# Altium PCB STM32F429VET6_SRK1201L.PcbDoc (part 1 of 2)
Units mil, origin at the board's own origin, x right, y up, seen from the top; angles counter-clockwise.
Board outline 1653 x 1966 mil, 4 copper layers (Top Layer, Layer 1, Layer 2, Bottom Layer), stack 23.756 mil thick; 125 components, 111 nets, 424 pads, 295 vias.
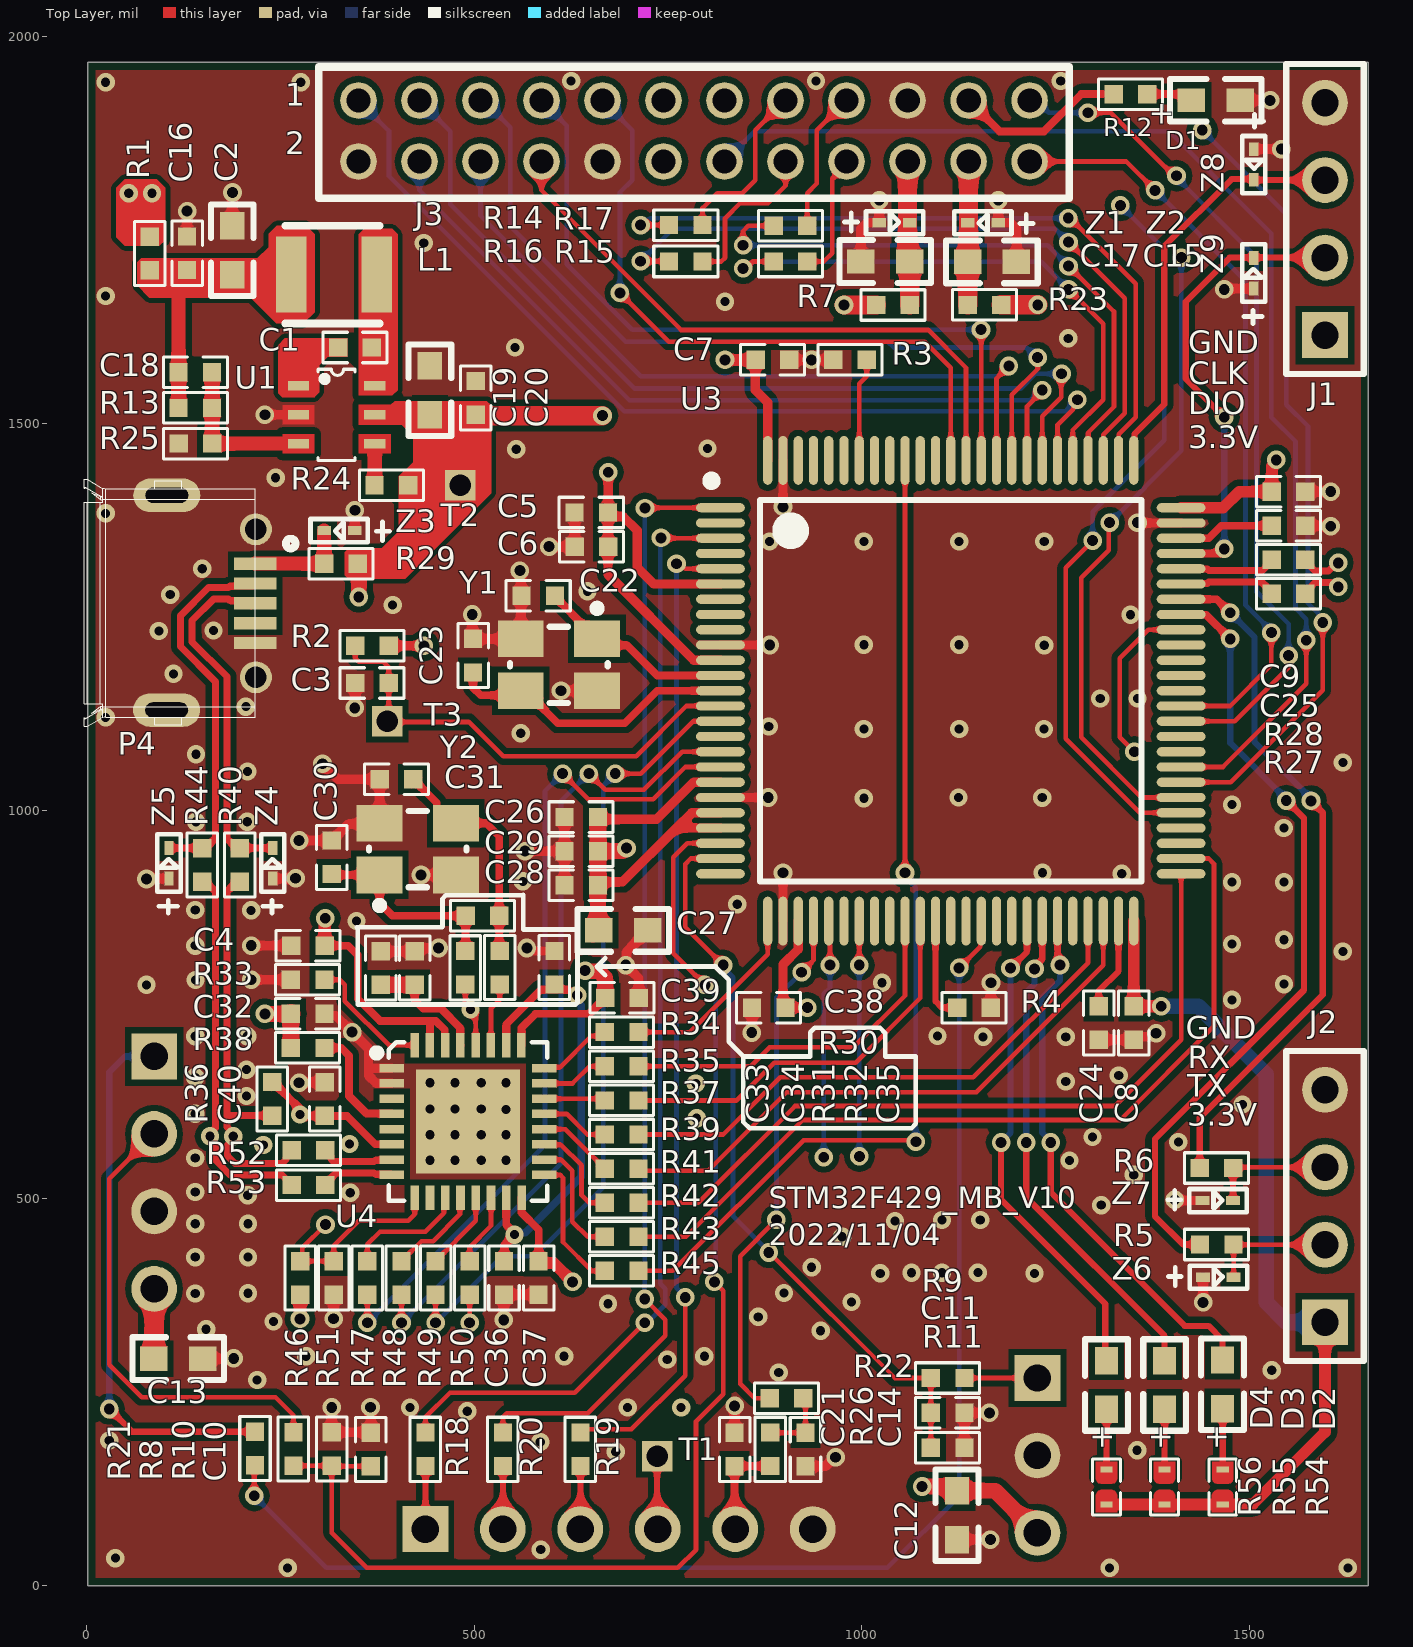
[diagram p0: Top Layer view]
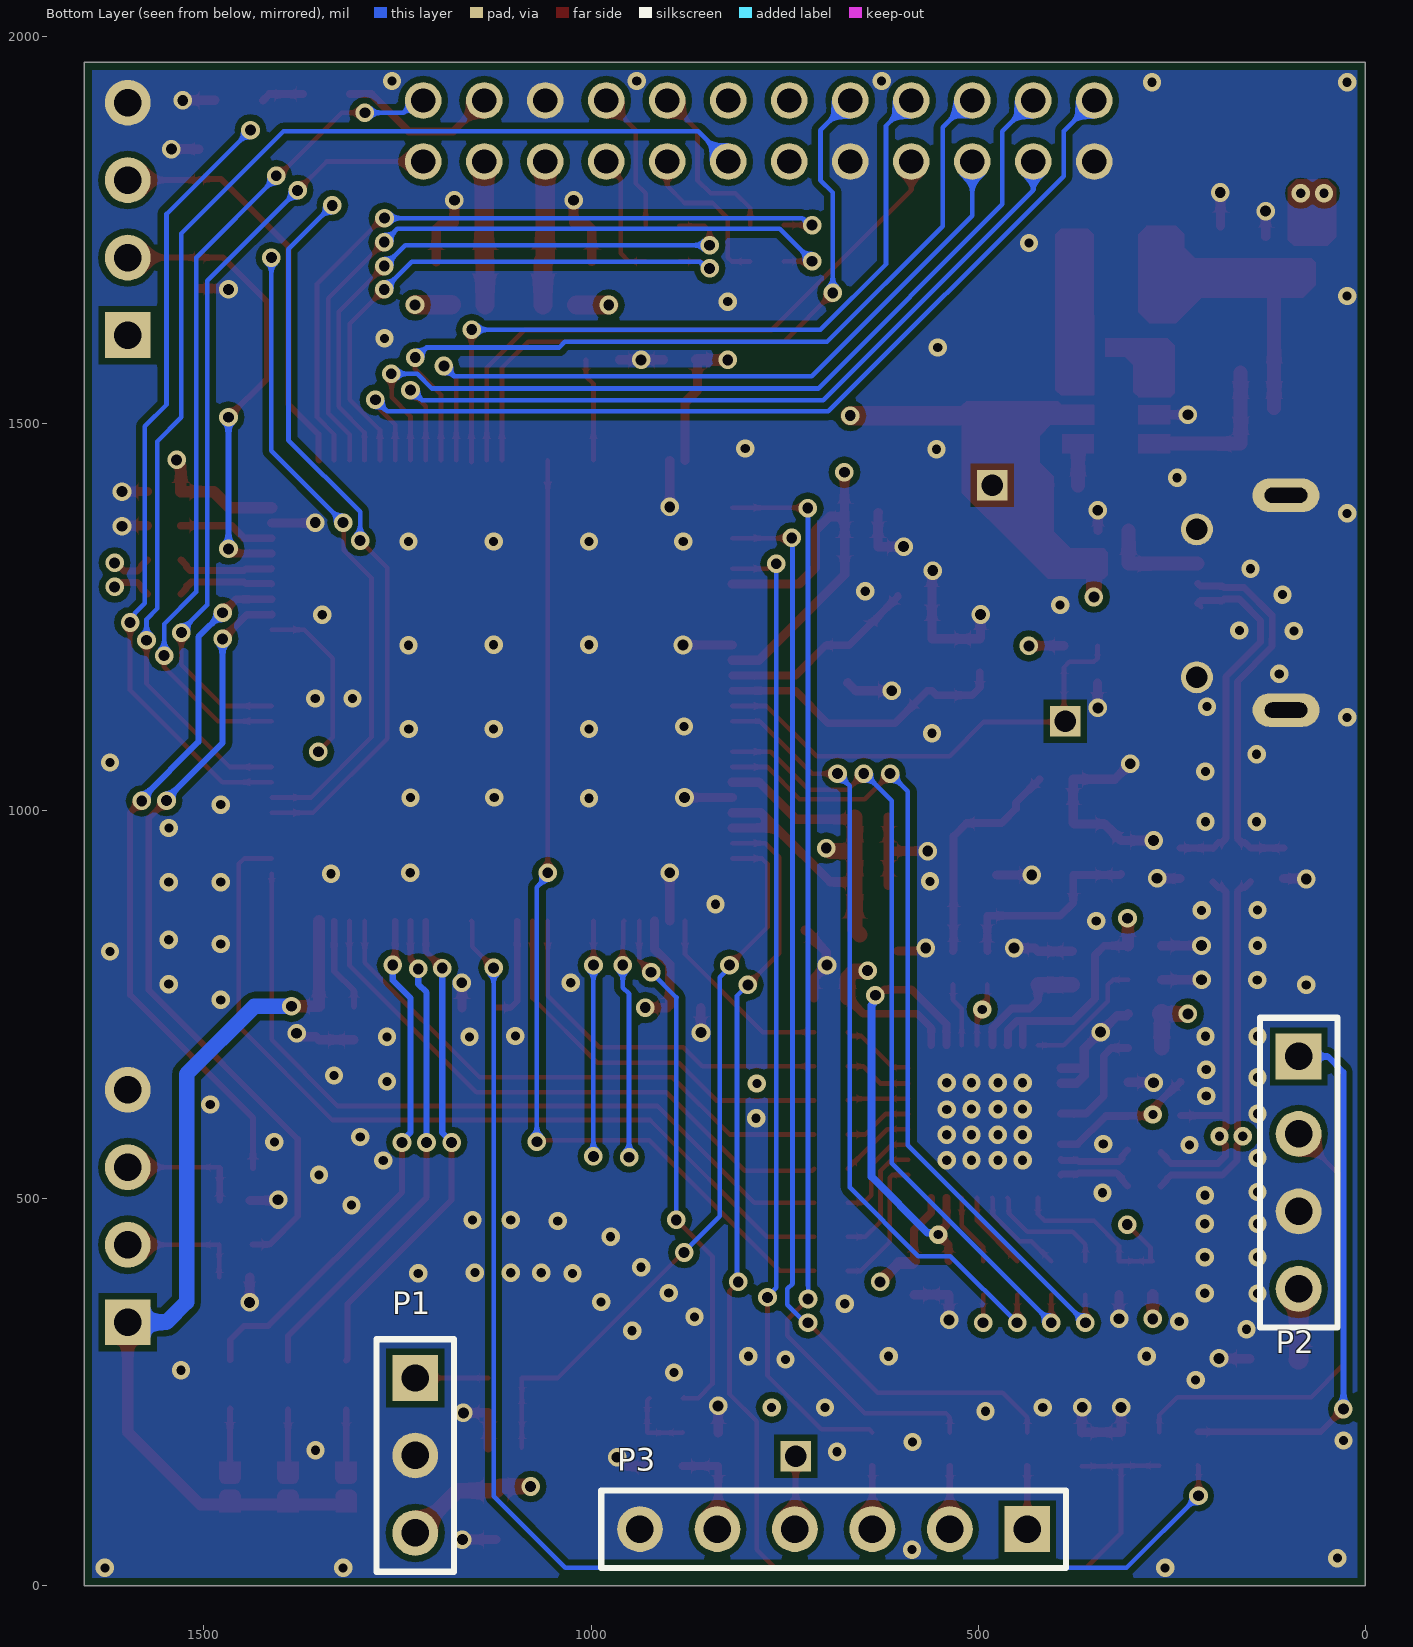
[diagram p1: Bottom Layer view, seen from below]
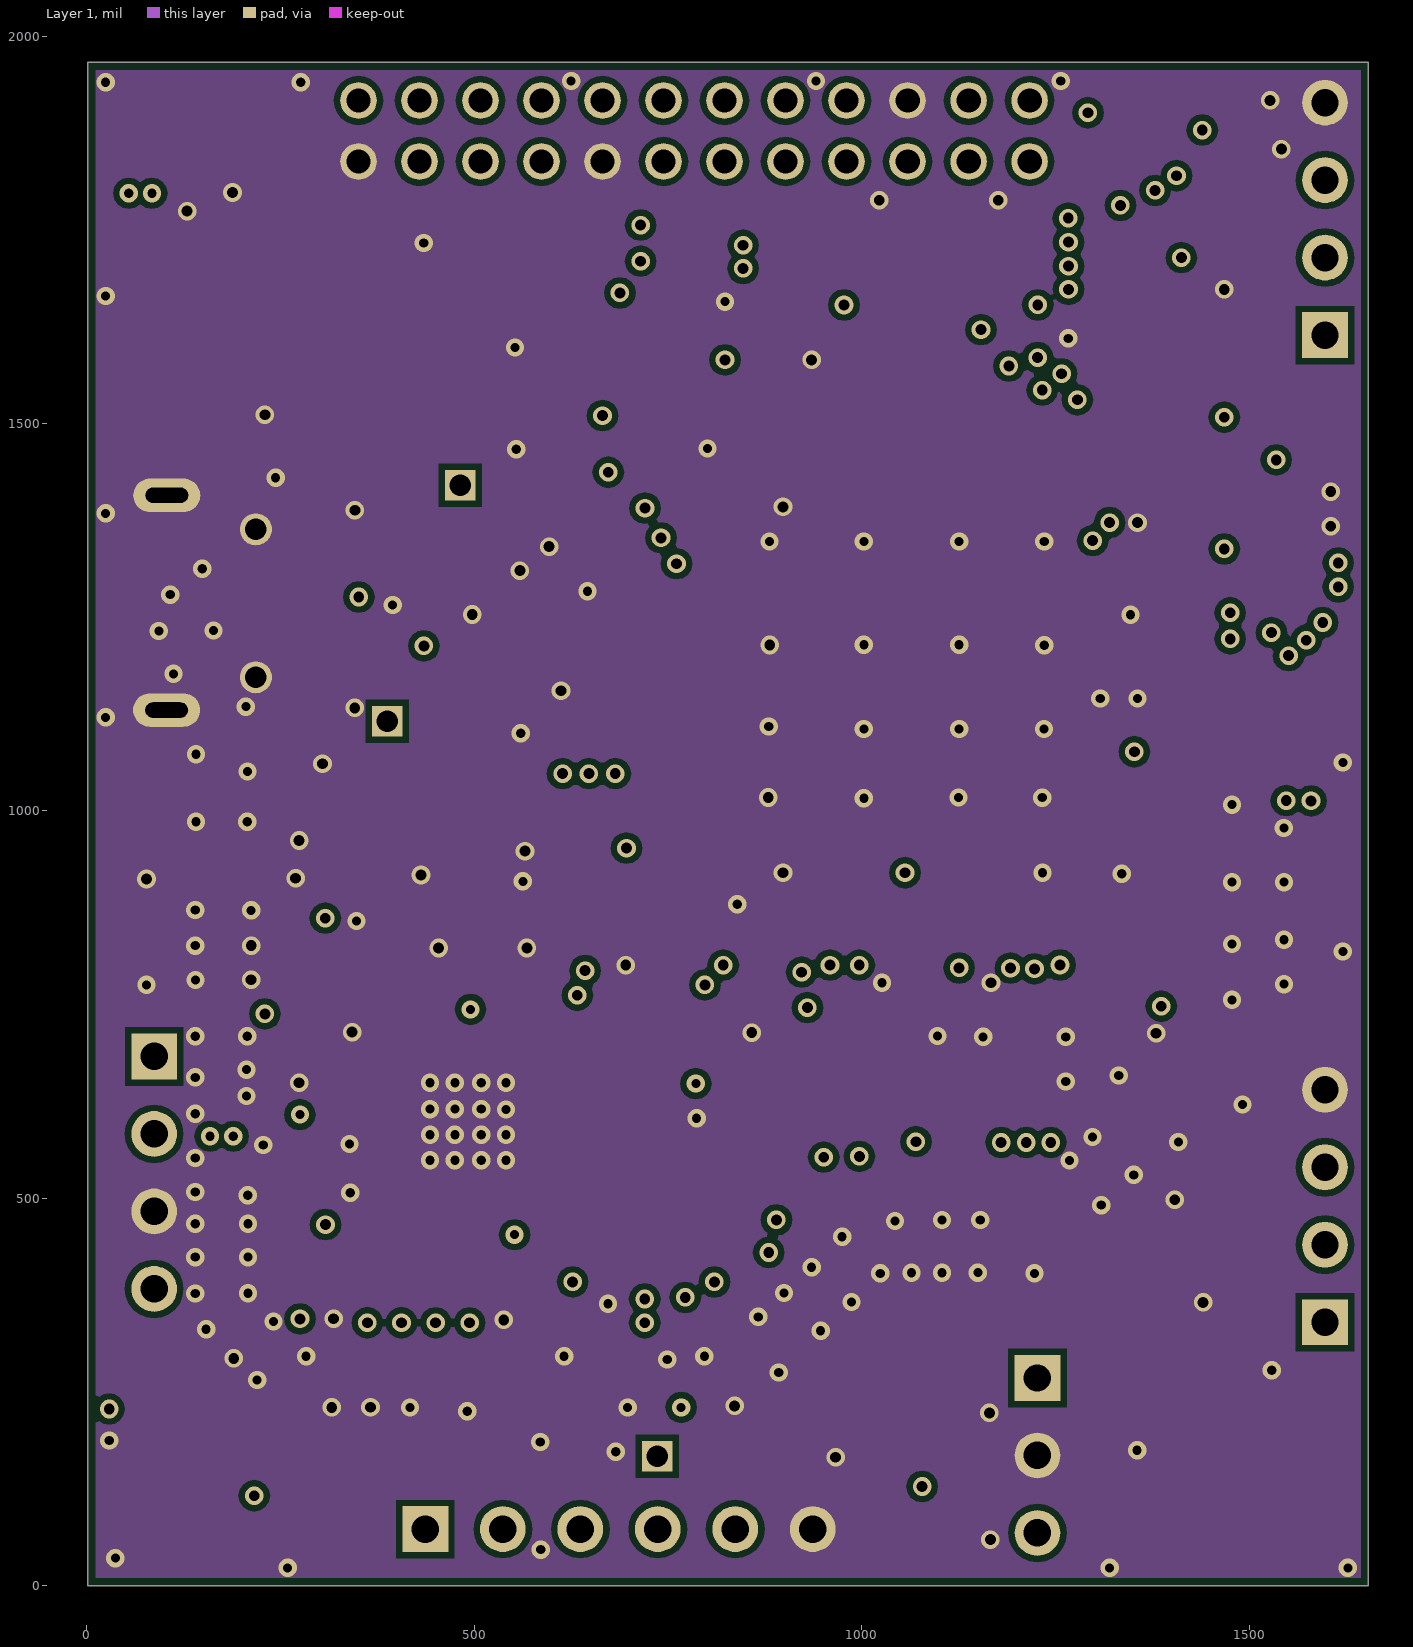
[diagram p2: Layer 1]
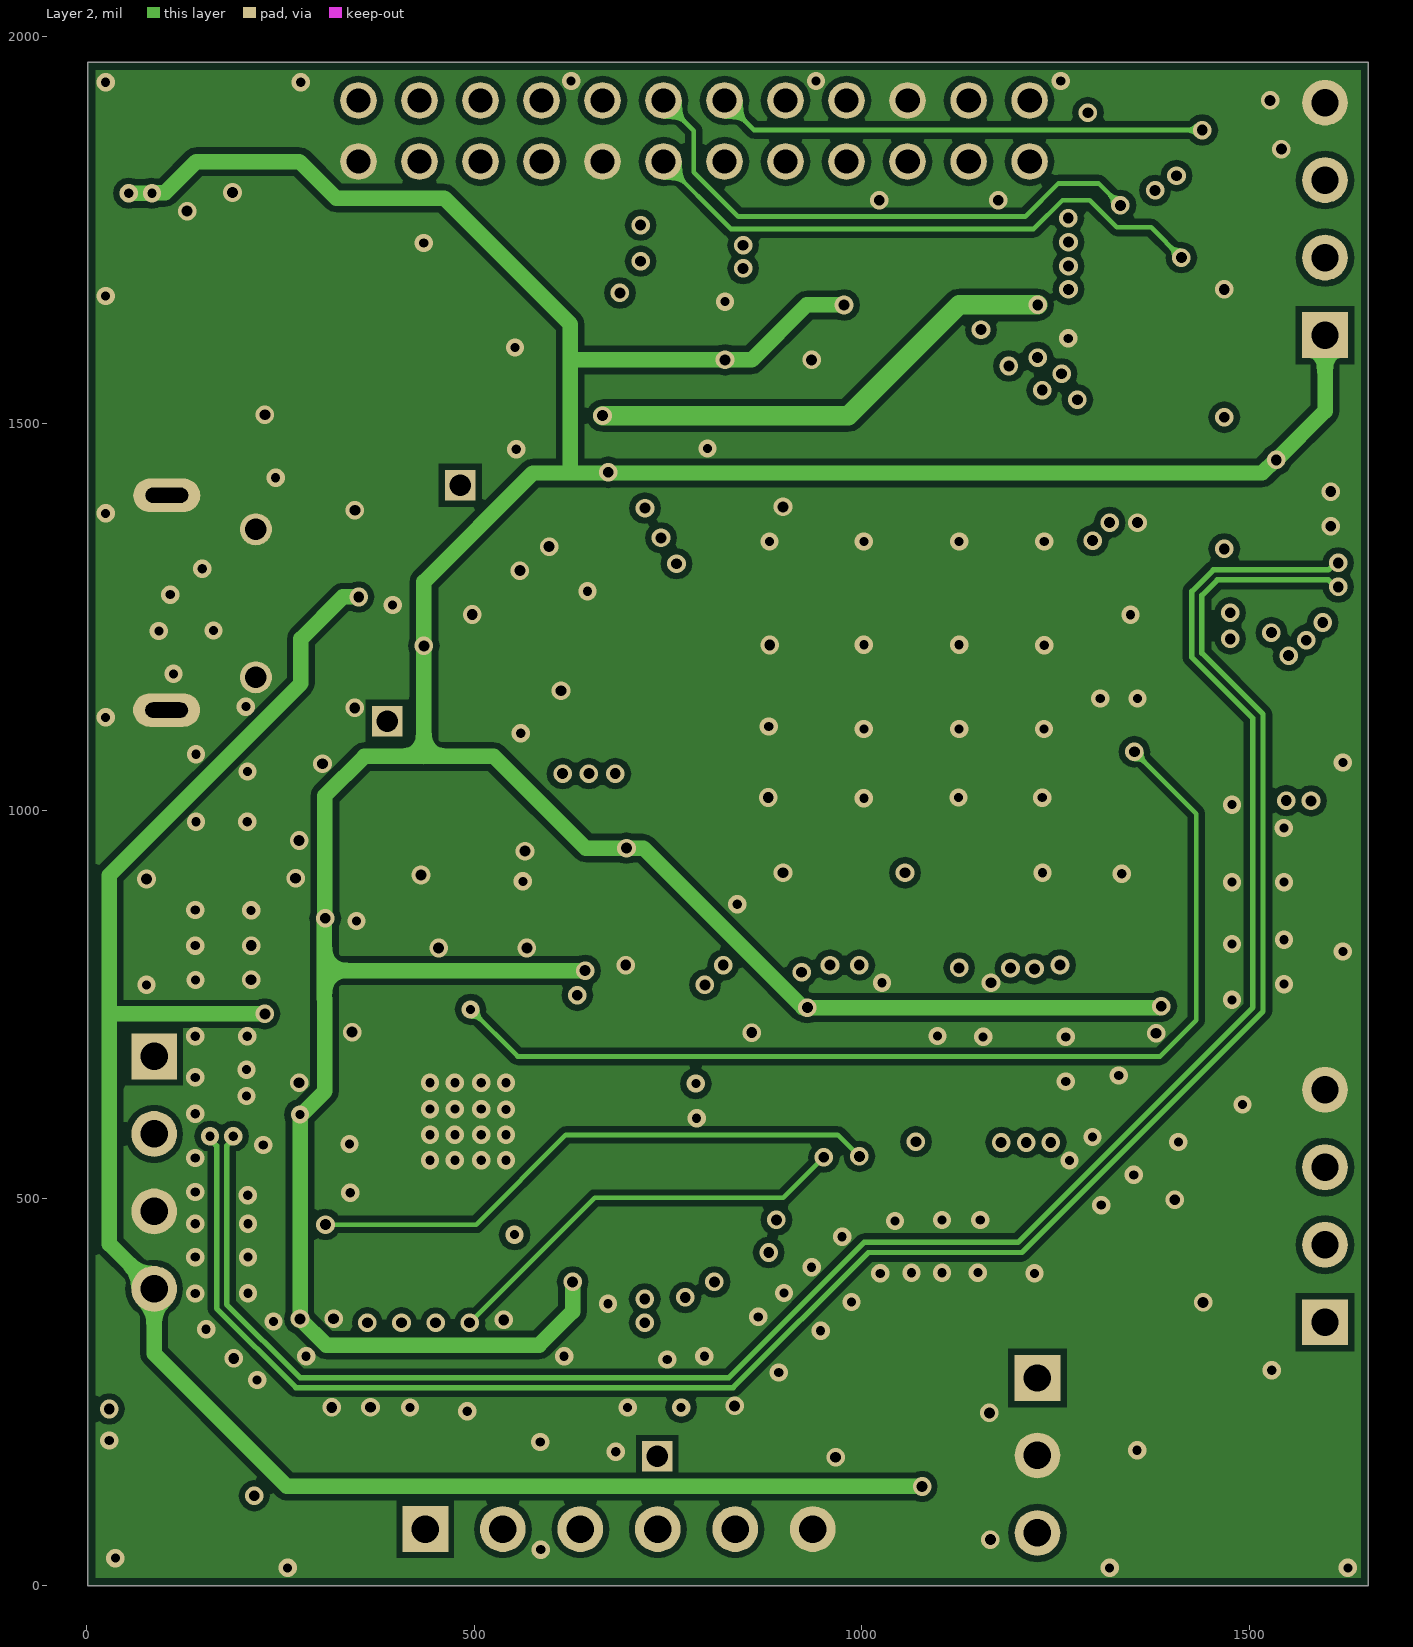
[diagram p3: Layer 2]
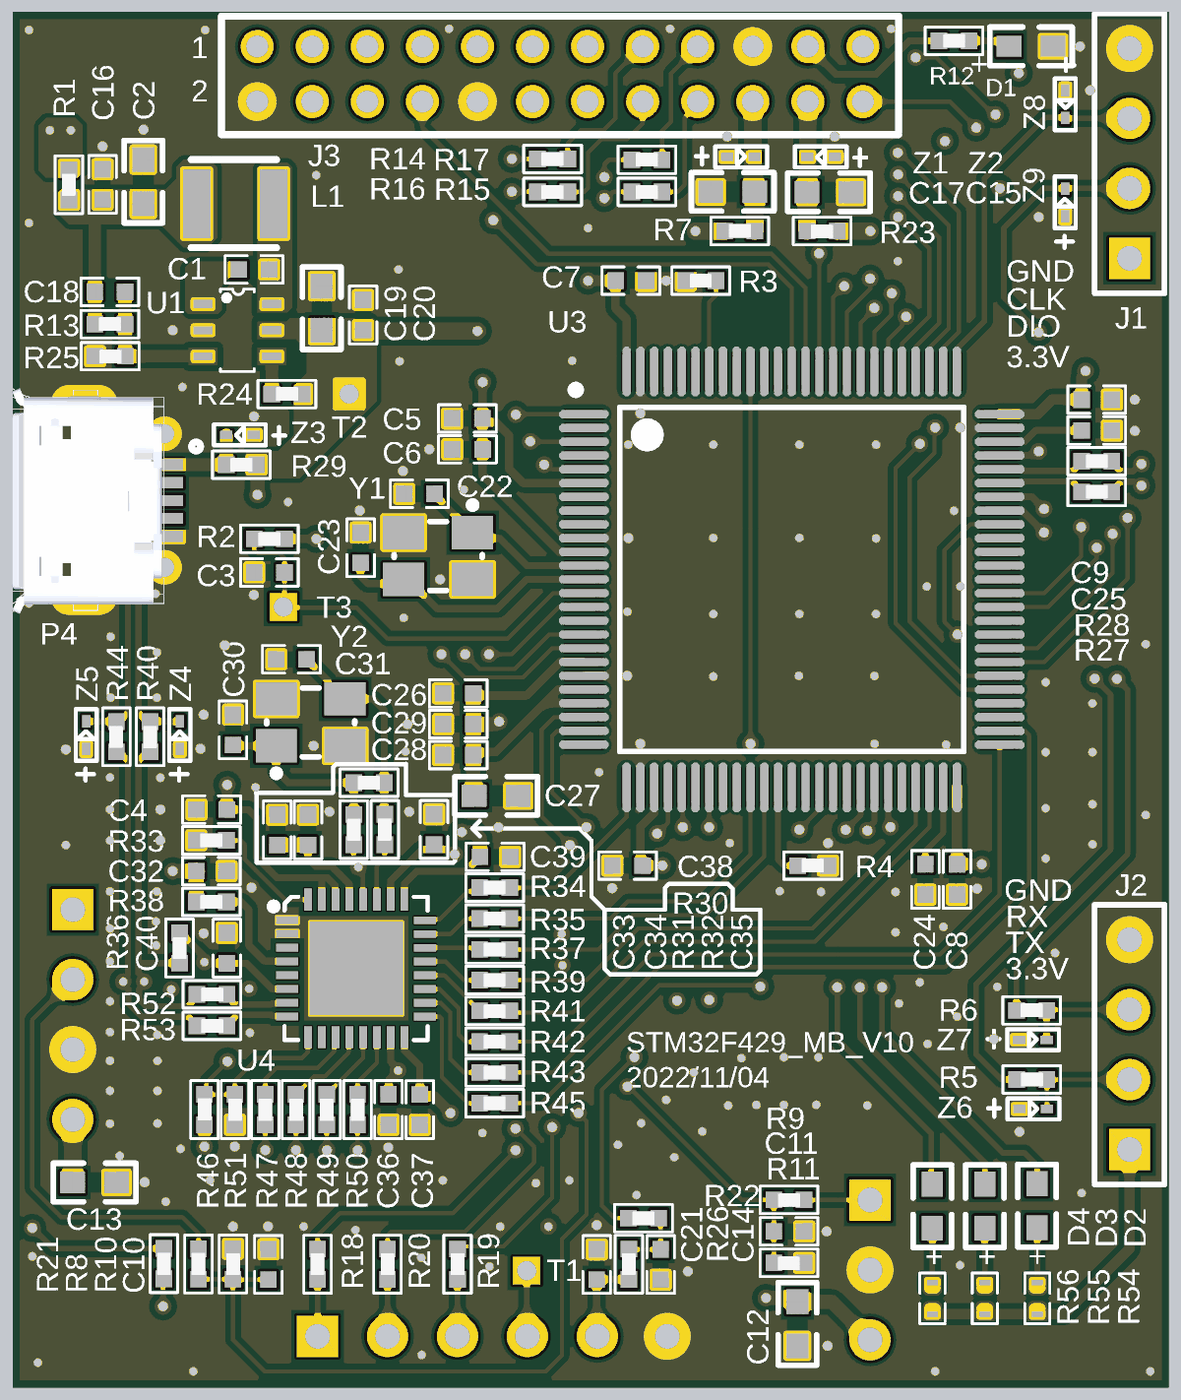
[diagram p4: 3D render of the assembled board from above, using the file's embedded part models]

## Layer stack, top to bottom
Top Solder: solder mask 0.4, Solder Resist, Dk 3.5
Top Layer: signal copper 1.4
Dielectric 2: prepreg 2.8, PP-006, Dk 4.1
Layer 1: signal copper 1.3779
Dielectric 1: dielectric 12.6, FR-4, Dk 4.8
Layer 2: signal copper 1.3779
Dielectric 3: prepreg 2.8, PP-006, Dk 4.1
Bottom Layer: signal copper 1.4
Bottom Solder: solder mask 0.4, Solder Resist, Dk 3.5

## Board outline
1,0 1,1966 1654,1966 1654,0

## Design rules (kind name [scope] priority, off if disabled: settings)
BoardOutlineClearance [All] p1: gap=10 ignorepadtopadclearanceinfootprint=FALSE except(0: Arc-SplitContinuation Track-OutlineEdge Track-CavityEdge Track-CutoutEdge Track-SplitBarrior Track-SplitContinuation SMDPad-SplitContinuation THPad-SplitContinuation Via-SplitContinuation Fill-SplitContinuation Poly-SplitContinuation Region-SplitContinuation Text-OutlineEdge Text-CavityEdge Text-CutoutEdge Text-SplitBarrior Text-SplitContinuation)
Clearance [All] p1: gap=6 ignorepadtopadclearanceinfootprint=FALSE except(0: Arc-Hole Track-Hole SMDPad-Hole THPad-Hole Via-Hole Fill-Hole Poly-Hole Region-Hole Text-Hole; 8: Arc-Poly Track-Poly SMDPad-Poly THPad-Poly Via-Poly Fill-Poly Poly-Poly)
DiffPairsRouting DiffPair_DiffPairsRouting [InDifferentialPair ('NewDifferentialPair4')] p1: maxlimit=6 minlimit=6 mostfreqgap=6 toplayer_minwidth=9 toplayer_maxwidth=9 toplayer_prefwidth=9 midlayer1_minwidth=9 midlayer1_maxwidth=9 midlayer1_prefwidth=9 midlayer2_minwidth=7 midlayer2_maxwidth=7 midlayer2_prefwidth=7 bottomlayer_minwidth=9 bottomlayer_maxwidth=9 bottomlayer_prefwidth=9 maxuncoupledlength=500
DiffPairsRouting DiffPair_DiffPairsRouting_1 [InDifferentialPair ('NewDifferentialPair3')] p2: maxlimit=6 minlimit=6 mostfreqgap=6 toplayer_minwidth=9 toplayer_maxwidth=9 toplayer_prefwidth=9 midlayer1_minwidth=9 midlayer1_maxwidth=9 midlayer1_prefwidth=9 midlayer2_minwidth=7 midlayer2_maxwidth=7 midlayer2_prefwidth=7 bottomlayer_minwidth=9 bottomlayer_maxwidth=9 bottomlayer_prefwidth=9 maxuncoupledlength=500
DiffPairsRouting DiffPair_DiffPairsRouting_2 [InDifferentialPair ('NewDifferentialPair2')] p3: maxlimit=6 minlimit=6 mostfreqgap=6 toplayer_minwidth=9 toplayer_maxwidth=9 toplayer_prefwidth=9 midlayer1_minwidth=9 midlayer1_maxwidth=9 midlayer1_prefwidth=9 midlayer2_minwidth=7 midlayer2_maxwidth=7 midlayer2_prefwidth=7 bottomlayer_minwidth=9 bottomlayer_maxwidth=9 bottomlayer_prefwidth=9 maxuncoupledlength=500
DiffPairsRouting DiffPair_DiffPairsRouting_3 [InDifferentialPair ('NewDifferentialPair1')] p4: maxlimit=6 minlimit=6 mostfreqgap=6 toplayer_minwidth=9 toplayer_maxwidth=9 toplayer_prefwidth=9 midlayer1_minwidth=9 midlayer1_maxwidth=9 midlayer1_prefwidth=9 midlayer2_minwidth=7 midlayer2_maxwidth=7 midlayer2_prefwidth=7 bottomlayer_minwidth=9 bottomlayer_maxwidth=9 bottomlayer_prefwidth=9 maxuncoupledlength=500
DiffPairsRouting [All] p5: maxlimit=10 minlimit=10 mostfreqgap=10 toplayer_minwidth=15 toplayer_maxwidth=15 toplayer_prefwidth=15 midlayer1_minwidth=15 midlayer1_maxwidth=15 midlayer1_prefwidth=15 midlayer2_minwidth=15 midlayer2_maxwidth=15 midlayer2_prefwidth=15 bottomlayer_minwidth=15 bottomlayer_maxwidth=15 bottomlayer_prefwidth=15 maxuncoupledlength=500
HoleToHoleClearance [All] p1: gap=0 allowstackedmicrovias=TRUE
MatchedLengths DiffPair_MatchedLengths [InDifferentialPair ('NewDifferentialPair4')] p1: tolerance=1000 checknetsindiffpair=FALSE checkdiffpairvsdiffpair=TRUE checkxsignals=TRUE checkothers=TRUE
MatchedLengths DiffPair_MatchedLengths_1 [InDifferentialPair ('NewDifferentialPair3')] p2: tolerance=1000 checknetsindiffpair=FALSE checkdiffpairvsdiffpair=TRUE checkxsignals=TRUE checkothers=TRUE
MatchedLengths DiffPair_MatchedLengths_2 [InDifferentialPair ('NewDifferentialPair2')] p3: tolerance=1000 checknetsindiffpair=FALSE checkdiffpairvsdiffpair=TRUE checkxsignals=TRUE checkothers=TRUE
MatchedLengths DiffPair_MatchedLengths_3 [InDifferentialPair ('NewDifferentialPair1')] p4: tolerance=1000 checknetsindiffpair=FALSE checkdiffpairvsdiffpair=TRUE checkxsignals=TRUE checkothers=TRUE
MinimumSolderMaskSliver [All] p1: minsoldermaskwidth=0
PlaneConnect [All] p1: planeconnectstyle=Direct reliefexpansion=20 reliefentries=4 reliefconductorwidth=10 reliefairgap=10
PolygonConnect [All] p1: connectstyle=Direct reliefconductorwidth=10 reliefentries=4 polygonreliefangle="90 Angle" airgapwidth=10
RoutingVias [All] p1: holewidth=28 width=50 viastyle="Through Hole" minholewidth=12 minwidth=22 maxholewidth=28 maxwidth=50
SilkToSilkClearance [All] p1: silktosilkclearance=0
SilkToSolderMaskClearance [IsPad] p1: minsilkscreentomaskgap=0 clearancetoexposedcopper=TRUE
SolderMaskExpansion [All] p1: expansion=4
Width [All] p1: maxlimit=50 minlimit=6 preferedwidth=10 minimp=50.000000 maximp=50.000000 favimp=50.000000
24 further rules are at their usual default settings.

## Classes and differential pairs
component class USB3300-EZK-PHY: C30 C31 C32 C33 C34 C35 C36 C37 C38 C39 C40 P4 R29 R30 R31 R32 R33 R34 R35 R36 R37 R38 R39 R40 R41 R42 R43 R44 R45 R46 R47 R48 R49 R50 R51 R52 R53 U4 Y2 Z3 Z4 Z5
component class SRK1201L_MODUL_CON: C1 C2 C10 C11 C12 C13 C14 C15 C16 C17 C18 C19 C20 C21 D1 J3 L1 P1 P2 P3 R1 R8 R9 R10 R11 R12 R13 R14 R15 R16 R17 R18 R19 R20 R21 R22 R23 R24 R25 R26 T1 T2 U1 Z1 Z2
component class STM32F429VET6: C3 C4 C5 C6 C7 C8 C9 C22 C23 C24 C25 C26 C27 C28 C29 D2 D3 D4 J1 J2 R2 R3 R4 R5 R6 R7 R27 R28 R54 R55 R56 T3 U3 Y1 Z6 Z7 Z8 Z9
differential pair NewDifferentialPair4: +UD+ -UD-
differential pair NewDifferentialPair3: +NetR52_2 -NetR53_2
differential pair NewDifferentialPair2: +NetR28_1 -NetR27_1
differential pair NewDifferentialPair1: +MICRO_USB_DP -MICRO_USB_DM

## Components (designator, comment, footprint, x,y, rotation, side; value= is the part's Value field where it differs from the comment)
C1 "100nF" C0402 346,1598 r180 top
C2 "10uF" C0603 187.73,1723.55 r90 top
C3 "100nF" C0402 368,1165 r180 top
C4 "100nF" C0402 285.35,826 r180 top
C5 "100nF" C0402 651,1385 r180 top
C6 "100nF" C0402 651.26,1341 r180 top
C7 "100nF" C0402 885,1582 r0 top
C8 "100nF" C0402 1351.22,726.19 r270 top
C9 "100nF" C0402 1551,1412 r0 top
C10 "100nF" C0402 366.61,175.82 r90 top
C11 "100nF" C0402 1111,223 r0 top
C12 "10uF" C0603 1123,91 r270 top
C13 "10uF" C0603 118,293 r0 top
C14 "1nF" C0402 927.51,175.65 r270 top
C15 "10uF" C0603 1168.14,1708.47 r0 top
C16 "100nF" C0402 129.38,1719.61 r270 top
C17 "10uF" C0603 1030.5,1709 r180 top
C18 "22pF" C0402 140,1566 r180 top
C19 "10uF/16V" C0603 442.81,1542.65 r90 top
C20 "100nF" C0402 501.95,1532.97 r270 top
C21 "1nF" C0402 836,175.65 r90 top
C22 "22pF" C0402 582.58,1277.44 r180 top
C23 "22pF" C0402 498.42,1200.29 r90 top
C24 "2.2uF" C0402 1305.94,726.19 r270 top
C25 "2.2uF" C0402 1551,1368 r0 top
C26 "1uF" C0402 638,992 r180 top
C27 "10uF" C0603 692.34,845.68 r0 top
C28 "2.2uF" C0402 638,904 r180 top
C29 "100nF" C0402 638,948 r180 top
C30 "9pF" C0402 316,940 r90 top
C31 "9pF" C0402 399.51,1040.79 r180 top
C32 "2.2uF" C0402 285,738 r0 top
C33 "4.7uF" C0402 379.19,797 r90 top
C34 "100nF" C0402 423.19,797 r90 top
C35 "4.7uF" C0402 603.48,797.56 r90 top
C36 "100nF" C0402 538.38,397.21 r270 top
C37 "100nF" C0402 583,397 r270 top
C38 "100nF" C0402 880,746 r180 top
C39 "100nF" C0402 690.71,758.49 r0 top
C40 "100nF" C0402 307,628 r90 top
D1 "LED1" LED-0603 1457,1917 r0 top
D2 "LED1" LED-0603 1465.63,259.74 r90 top
D3 "LED1" LED-0603 1391,259 r90 top
D4 "LED1" LED-0603 1316,259 r90 top
J1 "DOWNLOAD" J4 1598,1614 r270 top
J2 "ISP" J4 1598,340 r270 top
J3 "DC3_24P" "CON2.0-12X2 -SWAP" 1216.7,1916.74 r180 top
L1 "PRS3015-100MT" PRS3015 374.18,1692.05 r180 top
P1 "Header 3" HDR1X3-2.54 1226.85,268.01 r270 bottom locked
P2 "Header4" J4 86.85,683.01 r90 bottom locked
P3 "Header 6" HDR1X6 436.92,73 r0 bottom locked
P4 "USB" "USB 牛角头" 217.17,1318.98 r90 top
R1 "0" R0402#1 81.35,1719.22 r270 top
R2 "10K" R0402#1 368,1213 r180 top
R3 "10K" R0402#1 985,1582 r180 top
R4 "10K" R0402#1 1145,746 r180 top
R5 "100R" R0402#1 1458.2,440.32 r0 top
R6 "100R" R0402#1 1458,539 r0 top
R7 "0" R0402#1 1040.43,1652.84 r0 top
R8 "0" R0402#1 266.61,176.43 r90 top
R9 "0" R0402#1 1111,268 r0 top
R10 "47K" R0402#1 315.91,176.43 r270 top
R11 "47K" R0402#1 1111,178 r180 top
R12 "300R" R0402#1 1347,1925 r0 top
R13 "100K" R0402#1 140,1520 r180 top
R14 "0" R0402#1 773,1756 r180 top
R15 "0" R0402#1 908,1709 r180 top
R16 "0" R0402#1 773,1709 r180 top
R17 "0" R0402#1 908,1755 r180 top
R18 "0" R0402#1 437,176 r90 top
R19 "0" R0402#1 637,176 r90 top
R20 "0" R0402#1 537,176 r90 top
R21 "0" R0402#1 217,177 r270 top
R22 "1K" R0402#1 903,242 r180 top
R23 "0" R0402#1 1158.52,1652.93 r180 top
R24 "47k" R0402#1 393,1420 r0 top
R25 "22K" R0402#1 140.35,1474 r0 top
R26 "1K" R0402#1 882,176 r90 top
R27 "NC" R0402#1 1551,1280 r0 top
R28 "NC" R0402#1 1551,1324 r0 top
R29 "0 OHM" R0402#1 327.94,1318.98 r180 top
R30 "1M" R0402#1 510.5,864.44 r180 top
R31 "0" R0402#1 488.5,797.44 r270 top
R32 "0" R0402#1 532.97,797.56 r270 top
R33 "12K_1%" R0402#1 285,782 r180 top
R34 "0" R0402#1 690.21,714.43 r180 top
R35 "0" R0402#1 690.21,670.24 r180 top
R36 "1.5K" R0402#1 239.48,628.28 r270 top
R37 "0" R0402#1 690.21,626.24 r180 top
R38 "100" R0402#1 285,694 r180 top
R39 "0" R0402#1 690.21,582.24 r180 top
R40 "10" R0402#1 197.49,929.94 r270 top
R41 "0" R0402#1 690.21,538.24 r180 top
R42 "0" R0402#1 690.21,494.24 r180 top
R43 "0" R0402#1 690.21,450.24 r180 top
R44 "10" R0402#1 149.06,930.16 r270 top
R45 "0" R0402#1 690.21,406.24 r180 top
R46 "NC" R0402#1 275.26,397.21 r90 top
R47 "0" R0402#1 362.07,397.21 r270 top
R48 "0" R0402#1 406.07,397.21 r270 top
R49 "0" R0402#1 450.07,397.21 r270 top
R50 "33" R0402#1 494.07,397.21 r270 top
R51 "0" R0402#1 318.73,397.21 r270 top
R52 "0" R0402#1 286,562 r0 top
R53 "0" R0402#1 286,517 r0 top
R54 "2K" R0402#2 1466,104.72 r90 top
R55 "2K" R0402#2 1391,104.72 r90 top
R56 "2K" R0402#2 1316,104.72 r90 top
T1 "" TestPoints 736,167 r0 top
T2 "" TestPoints-0.7 482.08,1420 r0 top
T3 "" TestPoints-0.7 387.9,1115.62 r90 top
U1 "SY8120B1ABC" SOT-23-6 273.13,1548.56 r0 top
U3 "STM32F429VET6" LQFP-100_L14.0-W14.0-P0.50-LS16.0-BL 1115,1155 r270 top
U4 "USB3300-EZK" QFN-32_L5.0-W5.0-P0.50-BL-EP3.4 492.03,599.01 r270 top
Y1 "8M" CRYSTAL_3.2*2.5 658.5,1221.94 r180 top
Y2 "24M" CRYSTAL_3.2*2.5 377.86,917.23 r0 top
Z1 "ESD9L5.0ST5G" SOD-923 1022.63,1759 r0 top
Z2 "ESD9L5.0ST5G" SOD-923 1176.37,1759 r180 top
Z3 "ESD9L5.0ST5G" SOD-923 345.66,1361.7 r180 top
Z4 "ESD9L5.0ST5G" SOD-923 240,912.63 r90 top
Z5 "ESD9L5.0ST5G" SOD-923 106,912.63 r90 top
Z6 "ESD9L5.0ST5G" SOD-923 1440.63,398 r0 top
Z7 "ESD9L5.0ST5G" SOD-923 1440,497 r0 top
Z8 "ESD9L5.0ST5G" SOD-923 1506,1854 r270 top
Z9 "ESD9L5.0ST5G" SOD-923 1506,1674 r90 top

## Footprints (in the part's own frame and the unit in brackets; to place one, negate y for a bottom-side part, rotate by r counter-clockwise, add the part's x,y. Pads: shape width x height; smd on the part's side, far side on the other; paste and mask are expansions set on the pad)
C0402 [mm]
  rect 0.6x0.6 smd: 1(-0.55,0) 2(0.55,0)
  silkscreen extent -1.05,-0.5 1.05,0.5, body extent -0.5,-0.3 0.5,0.3, height 0.2
C0603 [mm]
  rect 0.9x0.8 smd: 1(-0.8,0) 2(0.8,0)
  silkscreen extent -1.5,-0.7 1.5,0.7, body extent -0.8,-0.4 0.8,0.4, height 0.6
"CON2.0-12X2 -SWAP" [mm]
  round 1.2 hole 0.8: 1(22,0) 2(22,2) 3(20,0) 4(20,2) 5(18,0) 6(18,2) 7(16,0) 8(16,2) 9(14,0) 10(14,2) 11(12,0) 12(12,2) 13(10,0) 14(10,2) 15(8,0) 16(8,2) 17(6,0) 18(6,2) 19(4,0) 20(4,2) 21(2,0) 22(2,2) 23(0,0) 24(0,2)
  silkscreen extent -1.3,-1.1 23.3,3.2
CRYSTAL_3.2*2.5 [mm]
  rect 1.5x1.2 smd: 1(0,0) 2(2.5,0) 3(2.5,1.7) 4(0,1.7)
  silkscreen extent -0.35,-1.12 2.85,2.1
HDR1X3-2.54 [mm] "Connector; Header; 3 Position"
  rect 1.5x1.5 hole 0.9: 1(0,0)
  round 1.5 hole 0.9: 2(2.54,0) 3(5.08,0)
  silkscreen extent -1.27,-1.27 6.35,1.27, body extent -1.29,-1.29 6.33,1.25, height 10.1
HDR1X6 [mm] "Connector; Header; 6 Position"
  rect 1.5x1.5 hole 0.9: 1(0,0)
  round 1.5 hole 0.9: 2(2.54,0) 3(5.08,0) 4(7.62,0) 5(10.16,0) 6(12.7,0)
  silkscreen extent -1.27,-1.27 13.97,1.27
J4 [mm]
  rect 1.5x1.5 hole 0.9: 1(0,0)
  round 1.5 hole 0.9: 2(-2.54,0) 3(-5.08,0) 4(-7.62,0)
  silkscreen extent -8.89,-1.27 1.27,1.27
LED-0603 [mm]
  rect 0.9x0.762 smd: 1(-0.8,0) 2(0.8,0)
  silkscreen extent -1.5,-0.7 1.5,0.7
LQFP-100_L14.0-W14.0-P0.50-LS16.0-BL [mm]
  oval 0.3x1.6 smd mask+0.051: 1(-6,-7.55) 2(-5.5,-7.55) 3(-5,-7.55) 4(-4.5,-7.55) 5(-4,-7.55) 6(-3.5,-7.55) 7(-3,-7.55) 8(-2.5,-7.55) 9(-2,-7.55) 10(-1.5,-7.55) 11(-1,-7.55) 12(-0.5,-7.55) 13(0,-7.55) 14(0.5,-7.55) 15(1,-7.55) 16(1.5,-7.55) 17(2,-7.55) 18(2.5,-7.55) 19(3,-7.55) 20(3.5,-7.55) 21(4,-7.55) 22(4.5,-7.55) 23(5,-7.55) 24(5.5,-7.55) 25(6,-7.55) 51(6,7.55) 52(5.5,7.55) 53(5,7.55) 54(4.5,7.55) 55(4,7.55) 56(3.5,7.55) 57(3,7.55) 58(2.5,7.55) 59(2,7.55) 60(1.5,7.55) 61(1,7.55) 62(0.5,7.55) 63(0,7.55) 64(-0.5,7.55) 65(-1,7.55) 66(-1.5,7.55) 67(-2,7.55) 68(-2.5,7.55) 69(-3,7.55) 70(-3.5,7.55) 71(-4,7.55) 72(-4.5,7.55) 73(-5,7.55) 74(-5.5,7.55) 75(-6,7.55)
  oval 1.6x0.3 smd mask+0.051: 26(7.55,-6) 27(7.55,-5.5) 28(7.55,-5) 29(7.55,-4.5) 30(7.55,-4) 31(7.55,-3.5) 32(7.55,-3) 33(7.55,-2.5) 34(7.55,-2) 35(7.55,-1.5) 36(7.55,-1) 37(7.55,-0.5) 38(7.55,0) 39(7.55,0.5) 40(7.55,1) 41(7.55,1.5) 42(7.55,2) 43(7.55,2.5) 44(7.55,3) 45(7.55,3.5) 46(7.55,4) 47(7.55,4.5) 48(7.55,5) 49(7.55,5.5) 50(7.55,6) 76(-7.55,6) 77(-7.55,5.5) 78(-7.55,5) 79(-7.55,4.5) 80(-7.55,4) 81(-7.55,3.5) 82(-7.55,3) 83(-7.55,2.5) 84(-7.55,2) 85(-7.55,1.5) 86(-7.55,1) 87(-7.55,0.5) 88(-7.55,0) 89(-7.55,-0.5) 90(-7.55,-1) 91(-7.55,-1.5) 92(-7.55,-2) 93(-7.55,-2.5) 94(-7.55,-3) 95(-7.55,-3.5) 96(-7.55,-4) 97(-7.55,-4.5) 98(-7.55,-5) 99(-7.55,-5.5) 100(-7.55,-6)
  silkscreen extent -7.03,-8 6.25,6.25
PRS3015 [mm]
  rect 1x2.5 smd: 1(0,0) 2(2.8,0)
  silkscreen extent -0.1,-1.6 3,1.6, body extent -0.1,-1.5 2.9,1.5, height 1.5
QFN-32_L5.0-W5.0-P0.50-BL-EP3.4 [mm]
  rect 0.28x0.8 smd mask+0.05: 1(-1.75,-2.5) 2(-1.251,-2.5) 3(-0.751,-2.5) 4(-0.251,-2.5) 5(0.249,-2.5) 6(0.749,-2.5) 7(1.249,-2.5) 8(1.749,-2.5) 17(1.752,2.5) 18(1.251,2.5) 19(0.752,2.5) 20(0.251,2.5) 21(-0.248,2.5) 22(-0.749,2.5) 23(-1.248,2.5) 24(-1.749,2.5)
  rect 0.8x0.28 smd mask+0.05: 9(2.5,-1.748) 10(2.5,-1.248) 11(2.5,-0.748) 12(2.5,-0.248) 13(2.5,0.252) 14(2.5,0.752) 15(2.5,1.252) 16(2.5,1.752) 25(-2.5,1.75) 26(-2.5,1.25) 27(-2.5,0.75) 28(-2.5,0.25) 29(-2.5,-0.25) 30(-2.5,-0.75) 31(-2.5,-1.25) 32(-2.5,-1.75)
  rect 3.4x3.4 smd mask+0.05: 33(0,0)
  silkscreen extent -2.6,-3.12 2.6,2.6
R0402#1 [mm]
  rect 0.6x0.6 smd: 1(-0.55,0) 2(0.55,0)
  silkscreen extent -1.05,-0.5 1.05,0.5, body extent -0.49,-0.25 0.51,0.25, height 0.35
R0402#2 [mm]
  rect 0.2x0.4 smd: 1(0,0) 2(1.15,0)
  Top Layer region: 0.873,0.352 0.873,-0.351 1.401,-0.351 1.401,0.352
  Top Layer region: -0.252,0.352 -0.252,-0.351 0.276,-0.351 0.316,-0.351 0.39,-0.321 0.446,-0.264 0.477,-0.191 0.477,-0.151 0.477,-0.151 0.477,0.152 0.477,0.191 0.446,0.265 0.39,0.321 0.316,0.352 0.276,0.352 0.276,0.352
  Top Layer region: 1.402,-0.352 1.402,0.351 0.874,0.351 0.834,0.351 0.76,0.321 0.704,0.264 0.673,0.191 0.673,0.151 0.673,0.151 0.673,-0.152 0.673,-0.191 0.704,-0.265 0.76,-0.321 0.834,-0.352 0.874,-0.352 0.874,-0.352
  silkscreen extent -0.35,-0.46 1.5,0.46, body extent 0.12,-0.26 1.12,0.24, height 0.35
SOD-923 [mm]
  rect 0.45x0.3 smd: A(0,0) K(1,0)
  silkscreen extent -1.14,-0.38 1.45,0.38
SOT-23-6 [mm]
  rect 0.7x0.3 smd: 1(0,0) 2(0,-0.95) 3(0,-1.9) 4(2.5,-1.9) 5(2.5,-0.95) 6(2.5,0)
  Top Layer region: -0.526,-0.312 0.527,-0.312 0.527,0.341 -0.526,0.341
  Top Layer region: -0.527,-1.276 0.526,-1.276 0.526,-0.623 -0.527,-0.623
  Top Layer region: -0.527,-2.226 0.526,-2.226 0.526,-1.573 -0.527,-1.573
  Top Layer region: 1.974,-0.312 3.026,-0.312 3.026,0.341 1.974,0.341
  Top Layer region: 1.972,-1.276 3.025,-1.276 3.025,-0.623 1.972,-0.623
  Top Layer region: 1.972,-2.226 3.025,-2.226 3.025,-1.573 1.972,-1.573
  silkscreen extent 0.63,-2.45 1.86,0.54, body extent -0.16,-2.39 2.64,0.51, height 1.45
TestPoints [mm]
  rect 1x1 hole 0.7: 1(0,0)
TestPoints-0.7 [mm]
  rect 1x1 hole 0.7: 1(0,0)
"USB 牛角头" [mm]
  rect 0.4x1.4 smd: 1(0,0) 2(-0.65,0) 3(-1.3,0) 4(-1.95,0) 5(-2.6,0)
  round 1.05 hole 0.7: 6(-3.725,-0.025) 7(1.125,-0.025)
  oval 1.1x2.2 hole 0.5 slot 1.4 at 90 deg: 8(-4.8,2.9) 9(2.24,2.895)
  silkscreen extent -5.34,-1.33 2.76,5.6, body extent -5.42,0.08 2.78,5.51, height 2.68

## Part data
C1 C2 C3 C4 C5 C6 C7 C8 C9 C10 C11 C12 C13 C14 C15 C16 C17 C18 C19 C20 C21 C22 C23 C24 C25 C26 C27 C28 C29 C30 C31 C32 C33 C34 C35 C36 C37 C38 C39 C40: library part Cap, "Capacitor", LatestRevisionDate=17-Jul-2002, LatestRevisionNote="Re-released for DXP Platform.", PackageDescription="Radial Cap, Thru-Hole; 2 Leads; 0.3 in Pin Spacing", PackageReference=RAD-0.3, Published=8-Jun-2000, Publisher="Altium Limited"
D1 D2 D3 D4: "Typical RED GaAs LED", LatestRevisionDate=08-Jul-2005, LatestRevisionNote="Mech Layer 1 removed.", PackageDescription="LED; 2 Leads", PackageReference=LED-1, Published=8-Jun-2000, Publisher="Altium Limited"
J1: library part 下载
J2 P2: library part J4
L1: library part Inductor, "Inductor", Code_IEC=1005, Code_JEITA=0402, LatestRevisionDate=29-May-2009, LatestRevisionNote="IPC-7351 Footprint Added.", PackageDescription="Chip Inductor", PackageReference=0402-A, Published=8-Jun-2000, Publisher="Altium Limited"
P1: "Header, 3-Pin", LatestRevisionDate=17-Jul-2002, LatestRevisionNote="Re-released for DXP Platform.", Publisher="Altium Limited"
P3: "Header, 6-Pin", LatestRevisionDate=17-Jul-2002, LatestRevisionNote="Re-released for DXP Platform.", Publisher="Altium Limited"
R1 R2 R3 R4 R5 R6 R7 R8 R9 R10 R11 R12 R13 R14 R15 R16 R17 R18 R19 R20 R21 R22 R23 R24 R25 R26 R27 R28 R29 R30 R31 R32 R33 R34 R35 R36 R37 R38 R39 R40 R41 R42 R43 R44 R45 R46 R47 R48 R49 R50 R51 R52 R53 R54 R55 R56: library part Res2, "Resistor", LatestRevisionDate=17-Jul-2002, LatestRevisionNote="Re-released for DXP Platform.", PackageDescription="Axial Device, Thru-Hole; 2 Leads; 0.4 in Pin Spacing", PackageReference=AXIAL-0.4, Published=8-Jun-2000, Publisher="Altium Limited"
T1 T2 T3: library part TestPoints, "TestPoints"
U1: library part H9108
U3: JLCPCB Part Class="Extended Part", Manufacturer=ST(Òâ·¨°, Voltage - Supply (Vcc/Vdd)="1.8V ~ 3.6V", A/D=16x12bit, Add into BOM=yes, CAN=2, Convert to PCB=yes, D/A=2x12bit, Datasheet=https://atta.szlcsc.com/upload/public/pdf/source/20170918/C95447_1505700207508975047.pdf, Device=STM32F429VET6, Ethernet="10/100 Ethernet MAC", Features=I2S,SAI, LCD="LCD TFT Controller up to 1024x728", LCSC Part Name=STM32F429VET6, Manufacturer Part=STM32F429VET6, Name=STM32F429VET6, Number of I/O=82, Program Memory Size=512KB, PWM=56, RAM Size=256KB, Speed=180MHz, SPI=4, Supplier=LCSC, Supplier Footprint=LQFP-100_14x14x05P, Supplier Part=C95447, Symbol=STM32F429VET6, UART/USART="4 USART+4 UART", USB Device=1, USB Host/OTG=1
U4: JLCPCB Part Class="Extended Part", Manufacturer=MICROCHIP(美国, Add into BOM=yes, Convert to PCB=yes, Datasheet=https://atta.szlcsc.com/upload/public/pdf/source/20170620/1497944729272.pdf, Device=USB3300-EZK, LCSC Part Name=USB3300-EZK, Manufacturer Part=USB3300-EZK, Name=USB3300-EZK, Supplier=LCSC, Supplier Footprint=QFN-32_5x5x05P, Supplier Part=C108954, Symbol=USB3300-EZK
Y1 Y2: library part CRYSTAL-PASSIVE_3225
Z1 Z2 Z3 Z4 Z5 Z6 Z7 Z8 Z9: library part "D Zener", "Zener Diode", LatestRevisionDate=17-Jul-2002, LatestRevisionNote="Re-released for DXP Platform.", PackageDescription="Diode, Thru-Hole; 2 Leads; 0.7 in Pin Spacing", PackageReference=DIODE-0.7, Published=8-Jun-2000, Publisher="Altium Limited"

## Via types
v1: diameter 23.62, hole 11.81, Top Layer to Bottom Layer, tented both sides, 157 vias
v2: diameter 24, hole 14, Top Layer to Bottom Layer, tented both sides, 138 vias

## Nets (pads, with @x,y where several pads share a name; then routed paths per layer and width w, separated by ;. In a path a pad name is that pad's centre, name@x,y a point inside that pad or via, vN(x,y) a via of type N, cw(c..) or ccw(c..) an arc to the next point about the centre after c; other vN are vias at no path point)
3.3V: C17.1 J3.20 R7.2 Z1.K | length 186.3
  Top Layer w25: J3.20 1059.22,1759 1059.22,1711.78 C17.1 1062.08,1708.92 R7.2
5V: C15.1 J3.22 R23.2 Z2.K | length 185.7
  Top Layer w25: R23.2 1136.87,1708.25 C15.1 1137.96,1709.79 J3.22
ANA: P3.4 T1.1 | length 94.4
  Top Layer w8: T1.1 736,73.92 P3.4
BOOT0: R3.1 U3.94 | length 134.5
  Top Layer w6: U3.94 996.89,1551.24 1006.65,1561 R3.1 R3.1@1007.14,1581.52
BOOT1: R4.2 U3.37 | length 134.9
  Top Layer w8: U3.37 1095.32,754.34 1103.66,746 R4.2
CLK: P3.2 R20.1 | length 81.4
  Top Layer w8: P3.2 537,73.08 R20.1
CLKOUT: R50.2 U3.30 | length 885.6
  Top Layer w6: v2@494.07,346.93 R50.2 ; U3.30 958.63,856.65 958.63,826.95 959.13,826.45 v2(959.13,800.81)
  Layer 2 w6: v2(494.07,339.21) 655.44,500.58 898.58,500.58 v2(951,553)
  Bottom Layer w6: v2@953.49,553 v2(951,553) 951,763.78 959.13,771.92 v2(959.13,800.81) v2@959,800.68
DAC_OUT: R22.2 U3.29 | length 684.2
  Top Layer w6: R22.2@880,243.35 R22.2 861.66,242 843.35,260.31 843.35,425.35 v2(890,472) ; v2(922.48,791.75) 937.83,807.1 U3.29
  Bottom Layer w6: v2(890,472) 890,758.96 889.84,759.12 v2(922.48,791.75)
DIVOUT2: P2.1 R21.1 | length 701.1
  Top Layer w8: v2(29,228) 58.35,198.65 R21.1
  Bottom Layer w8: v2(29,228) 29,662.68 49.32,683.01 P2.1
DIVOUT_MCU: R21.2 U3.40 | length 1780.4
  Top Layer w6: v2(216,116) 216,154.35 R21.2 ; v2(1125.79,797.23) 1153.26,824.7 1153.26,856.65 U3.40
  Bottom Layer w6: v2(216,116) 309,23 1033.16,23 1125.79,115.63 v2(1125.79,797.23)
GND: C2.2 C3.2 C4.2 C5.2 C6.2 C7.2 C8.2 C9.2 C10.2 C11.2 C12.2 C13.2 C14.2 C15.2 C16.1 C17.2 C19.2 C20.1 C21.2 C22.2 C23.2 C24.2 C25.2 C26.2 C27.2 C28.2 C29.2 C30.2 C31.2 C32.2 C33.2 C34.2 C35.2 C36.2 C37.2 C38.2 C39.2 C40.2 D1.2 J1.4 J2.4 J3.2 J3.10 J3.19 P1.2 P2.3 P3.6 P4.5 P4.6 P4.7 P4.8 P4.9 R3.2 R4.1 R10.1 R11.1 R25.1 R33.2 R51.2 U1.2 U3.10 U3.20 U3.27 U3.74 U3.99 U4.1 U4.2 U4.33 Y1.2 Y1.4 Y2.2 Y2.4 Z1.A Z2.A Z3.A Z4.A Z5.A Z6.A Z7.A Z8.A Z9.A | length 2944.8
  Top Layer w12: v2(77,912) 77.63,912.63 Z5.A ; C16.1 v2(129.38,1774) ; C13.2 189.3,293 v2(189.61,293.32) ; C2.2 187.73,1797.73 v2(188,1798) ; v2(212,782) R33.2 ; v2(212.16,826.11) 212.28,826 C4.2 ; v2(229.72,1511.16) U1.2 ; Z4.A 269.22,912.63 v2(269.5,912.91) ; v2(274,649) 274.65,649.65 C40.2 ; v2(274,961.65) C30.2 337.36,983.01 376.71,983.01 Y2.4 C31.2 324.06,1040.79 v2(304.1,1060.75) ; C32.2 309.01,735.65 321.17,735.65 v2(342.39,714.43) 363.46,693.36 363.46,665.94 ; v2(316,230) 315.91,229.91 R10.1 366.01,198.08 C10.2 366.61,229.62 v2(366.04,230.19) ; v2(318.46,344.44) 318.6,344.57 318.6,375.43 R51.2 ; Z3.A 345.73,1361.7 345.83,1361.79 345.83,1387.83 v2(346,1388) ; v2(345.83,1132.86) 346.35,1133.38 C3.2 ; C33.2 C34.2 427.54,823 v2(454,823) ; U4.2 373.62,648.28 363.46,658.43 363.46,665.94 ; U4.1 365.43,667.91 363.46,665.94 ; v2(431.31,917.23) Y2.2 ; v2(497.34,1253.43) 497.34,1223.02 C23.2 Y1.2 560.08,1308.91 v2(558.95,1310.03) ; v2(538,343) 538,375.18 C36.2 582.79,375.56 C37.2 ; v2(565.45,948) C29.2 ; v2(568,823) 568,820.43 569.21,819.22 C35.2 ; v2(596.66,1341) C6.2 629.61,1384.74 C5.2 ; v2(612,1155) Y1.4 Y1.4@668.88,1165.39 ; C28.2 C29.2 ; C26.2 C29.2 ; C39.2 712.37,783.95 v2(695.52,800.8) 696.45,801.73 696.45,817.93 712.12,833.6 712.12,835.94 721.87,845.68 C27.2 ; U3.20 v2(879.45,1017.2) ; U3.10 v2(881.35,1214.06) ; C21.2 v2(836,232.07) ; v2(858.18,713.68) 858.35,713.86 C38.2 ; U3.27 v2(898.48,920.11) ; v2(898.48,1392.32) U3.99 ; C7.2 v2(935.38,1582) R3.2 ; C14.2 953.42,154 965.23,165.81 v2(966.45,165.81) ; C17.2@999,1709.01 999,1751 1007,1759 Z1.A v2(1022.63,1788) ; C12.2 v2(1166.16,59.5) ; R11.1 C11.2 v2(1164.82,223) ; R4.1 1166.65,777.97 v2(1166.86,778.18) ; v2(1176.37,1788) Z2.A 1192.11,1759 1200,1751.11 1200,1708.83 C15.2 ; C24.2 C8.2 1354.98,708.29 1377.44,708.29 1382.14,713 v2(1380,713) ; v2(1356,1372) 1356.46,1371.54 U3.74 ; v2(1404,498) 1405,497 Z7.A ; v2(1440.63,365.54) Z6.A ; v2(1468,1673) 1469,1674 Z9.A ; D1.2@1485.54,1917 1526.98,1917 v2(1527.07,1916.91) ; Z8.A v2(1541.66,1854) ; C25.2 1604.8,1368 v2(1605.44,1367.36) ; C9.2 v2(1605.44,1412)
  other v1: 259.17,23 1319.99,23 1627.53,23 36.8,35.47 585.75,46.5 682.54,172.84 1355.55,174.68 585.16,185.5 29,187.35 491,225 417,230 698,230 219.8,265.44 893,275 1529.35,277.93 749,292 283,296 616,296 797,296 947,329 154,331 241,341 866.45,346.93 672.65,363.75 987,365.96 140,377 208,377.31 899.69,377.74 1024,403 1223,403 1064.32,403.89 1103.66,403.89 1150,404 935.38,411 140,424 208,424 974.76,450.24 140,467 208,467 1043,470.74 1103.66,472 1153,472 1309.25,491.09 207.66,503.89 340,507 140,508 1351.22,530.17 443,549 475,549 509,549 541,549 1268.3,548.84 140,552 227.67,568.81 339,570 1408.74,572.58 1298,579 443,582 475,582 509,582 541,582 787.01,603.28 140,609 541,614.43 443,615 475,615 509,615 1491.46,621.05 206,632 443,649 475,649 509,649 541,649 1263.29,650.56 140,656 1331.79,658.43 206,666 1156.79,708.29 1263.29,708.29 140,709 207,709 1097.77,709.39 1478,756 77,775.34 1545,776.31 1026.34,778.18 140.16,781.74 1621,818.32 140,826 1478,828 1545,833.6 348.1,857.84 140,872 212,871.54 839.41,879.41 1478,908 1545,908 562.69,908.94 1335.72,918.78 1233.4,920.09 1544.94,977.83 141,986 207,986 1478,1008 1002.8,1016.26 1125.05,1017.21 1233.11,1017 207.24,1050.66 1621,1062.48 141,1073 560.08,1100.09 1002.8,1105.59 1125.79,1105.59 1235.35,1105.59 880,1108.86 24.22,1120.67 205.19,1134.45 1308,1145 1356,1145 111.91,1176.81 1002.8,1214.33 1125.79,1214.33 1235.56,1213.7 93,1232 163.36,1232.68 1347.04,1253.08 394.67,1265.63 107.73,1279.02 646.08,1283.36 148.87,1312.48 881.11,1347.67 1002.8,1347.67 1125.79,1347.67 1235.56,1347.67 24.22,1383.94 243.66,1429.93 554.15,1466.61 801.02,1467.6 552.66,1598 1266.57,1609.81 823.66,1657.14 24.22,1664.49 434.91,1732.81 24.22,1940.36 276.16,1940.36 625,1942 941,1942 1256.94,1942
LE: P3.1 R18.1 | length 81.4
  Top Layer w8: P3.1 437,73.08 R18.1
LED_T1: D4.2 U3.43 | length 637.4
  Top Layer w8: v2(1180,572) 1180,497.83 1314.3,363.54 1314.3,292.2 D4.2 ; v2(1192.11,797) 1213.43,818.32 U3.43
  Bottom Layer w8: v2(1180,572) 1180,572.58 1192.11,584.69 v2(1192.11,797)
LED_T2: D3.2 U3.44 | length 649.8
  Top Layer w8: v2(1212.37,571.93) 1212.37,500.94 1390.98,322.33 D3.2 ; v2(1223,796) 1223,798.58 1233.11,808.69 U3.44
  Bottom Layer w8: v2(1212.37,571.93) 1212.37,765.68 1223,776.31 v2(1223,796)
LED_T3: D2.2 U3.45 | length 691.8
  Top Layer w8: v2(1244,572) 1244,508 1416.77,335.23 1447.67,335.23 1465.63,317.27 D2.2 ; U3.45 1252.8,808.53 1256,805.33 v2(1256,801)
  Bottom Layer w8: v2(1244,572) 1244,573.8 1233.11,584.69 1233.11,758.46 1256,781.35 v2(1256,801)
MICRO_USB_DM: R27.2 R44.2 R53.1 | length 3116.4
  Top Layer w9: R44.2 156.37,901.19 160.5,901.19 165.78,895.92 165.78,590.73 159,583.96 v1(159,580) 159,576.04 166.5,568.54 166.5,548.48 184.98,530 251.76,530 257.04,524.73 257.04,523.31 R53.1@264.35,516 ; R27.2 1579.96,1287.31 1579.96,1289.23 1585.24,1294.5 1605.44,1294.5 1610.94,1289 v2(1615,1289)
  Layer 2 w7: v1(159,580) 159,576.09 167.5,567.59 167.5,357.75 269.76,255.49 834.05,255.49 1008.56,430 1206.93,430 1518,741.07 1518,1124.72 1439.15,1203.56 1439.15,1277.97 1459.18,1298 1602.4,1298 1611.4,1289 v2(1615,1289)
MICRO_USB_DP: R28.2 R36.2 R40.2 R52.1 | length 3129.4
  Top Layer w9: 182.47,606.63 R36.2 ; R40.2 190.18,900.98 186.05,900.98 180.78,895.71 180.78,592.18 189,583.96 v1(189,580) 189,576.04 181.5,568.54 181.5,554.69 191.19,545 251.76,545 257.04,550.27 257.04,551.69 R52.1@264.35,559 ; R28.2 1579.96,1316.69 1579.96,1314.77 1585.24,1309.5 1602.75,1309.5 1613.25,1320 v2(1615,1320)
  Layer 2 w7: v1(189,580) 189,576.09 180.5,567.59 180.5,363.14 275.15,268.49 828.66,268.49 1003.17,443 1201.54,443 1505,746.46 1505,1119.33 1426.15,1198.18 1426.15,1283.36 1453.8,1311 1602.4,1311 1611.4,1320 v2(1615,1320)
NetC1_1: C1.1 L1.1 U1.6
NetC1_2: C1.2 U1.1
NetC2_1: C2.1 C16.2 C18.2 L1.2 R1.2 R13.2 | length 182.5
  Top Layer w18: R13.2 C18.2 118.35,1686.93 C16.2
NetC14_1: C14.1 R22.1 R26.2 | length 91.5
  Top Layer w6: R26.2 882.35,197.31 C14.1 927.51,239.14 R22.1
NetC18_1: C18.1 R13.1 R25.2 U1.3 | length 203.4
  Top Layer w18: C18.1 R13.1 161.65,1474.35 R25.2 272.91,1474 U1.3
NetC24_1: C24.1 U3.49 | length 120.5
  Top Layer w8: C24.1 1305.94,767.53 1331.54,793.12 U3.49
NetC25_1: C25.1 U3.73 | length 123.8
  Top Layer w10: U3.73 1447.85,1351.85 1464,1368 C25.1
NetD1_1: D1.1 R12.2 | length 55.5
  Top Layer w10: R12.2@1371.32,1925 1415.25,1925 D1.1@1423.43,1916.83
NetD2_1: D2.1 R54.2 | length 78.4
  Top Layer w8: D2.1 1466,227.87 R54.2
NetD3_1: D3.1 R55.2 | length 77.5
  Top Layer w8: R55.2 D3.1
NetD4_1: D4.1 R56.2 | length 77.5
  Top Layer w8: R56.2 D4.1
NetJ3_21: J3.21 R12.1 | length 210
  Top Layer w10: J3.21 1177.82,1876.88 1235.35,1876.88 1283.47,1925 1311.49,1925
NetR24_1: R24.1 U1.4 | length 53.9
  Top Layer w18: R24.1 371.56,1420.21 U1.4
NetR27_1: R27.1 U3.70 | length 125.5
  Top Layer w9: U3.70 1412.78,1293.34 1446.13,1293.34 1447.93,1295.14 1516.12,1295.14 1522.04,1289.23 1522.04,1287.31 R27.1
NetR28_1: R28.1 U3.71 | length 124.9
  Top Layer w9: U3.71 1412.78,1311.94 1446.13,1311.94 1447.93,1310.14 1517.4,1310.14 1522.04,1314.77 1522.04,1316.69 R28.1
NetR32_2: R32.2 U4.27 | length 83.2
  Top Layer w6: U4.27 521.56,744.81 532.97,756.22 R32.2
NetR33_1: R33.1 U4.32 | length 163.7
  Top Layer w6: R33.1 326.34,782 333,775.34 333,754.48 390.05,697.43 U4.32
NetR34_2: R34.2 U4.24 | length 97.4
  Top Layer w6: U4.24 591.71,669.11 610.98,669.11 651.26,709.39 663.51,709.39 R34.2
NetR35_2: R35.2 U4.23 | length 87.3
  Top Layer w6: U4.23 626.79,648.16 648.87,670.24 R35.2
NetR37_2: R37.2 U4.22 | length 79
  Top Layer w6: U4.22 666.33,628.48 R37.2
NetR38_1: R38.1 U4.4 | length 152.7
  Top Layer w10: R38.1 328.39,694 338.42,683.97 338.42,631.96 360.96,609.42 393.09,609.42 U4.4
NetR39_2: R39.2 U4.21 | length 89.1
  Top Layer w6: U4.21 619.53,608.79 646.08,582.24 R39.2
NetR41_2: R41.2 U4.20 | length 99.2
  Top Layer w6: U4.20 617.7,589.11 636.89,569.91 R41.2
NetR42_2: R42.2 U4.19 | length 131.6
  Top Layer w6: U4.19 590.72,569.14 611.68,569.14 638.5,542.32 638.5,504.09 648.34,494.24 R42.2
NetR43_2: R43.2 U4.18 | length 157.8
  Top Layer w6: U4.18 612.2,549.74 626.5,535.44 626.5,469.93 646.25,450.17 648.8,450.17 648.87,450.24 R43.2
NetR45_2: R45.2 U4.17 | length 178.1
  Top Layer w6: U4.17 610.98,530.05 614.5,526.53 614.5,443.5 651.83,406.17 668.49,406.17 R45.2
NetR47_1: R47.1 U4.11 | length 157.7
  Top Layer w6: R47.1 362.07,440.42 378.36,456.72 437.03,456.72 460.75,480.43 460.75,498.76 U4.11
NetR48_1: R48.1 U4.12 | length 122
  Top Layer w6: R48.1 431.92,444.72 446.87,444.72 481.51,479.35 481.51,499.83 U4.12
NetR49_1: R49.1 U4.13 | length 103.2
  Top Layer w6: R49.1 501.95,470.74 U4.13
NetR50_1: R50.1 U4.14 | length 93.1
  Top Layer w6: R50.1 494.07,437.03 521.64,464.59 U4.14
NetR52_2: R52.2 U4.7 | length 105.2
  Top Layer w6: U4.7@383.37,549.85 U4.7
  Top Layer w9: R52.2 314.96,554.69 314.96,551.21 318.67,547.51 370.59,547.51 371.92,548.84 392.59,548.84 U4.7
NetR53_2: R53.2 U4.8 | length 95.1
  Top Layer w9: R53.2@307.65,516 314.96,523.31 314.96,525.67 321.8,532.51 370.59,532.51 371.92,531.18 392.59,531.18 U4.8
NRST: C3.1 R2.2 T3.1 U3.14 | length 606.7
  Top Layer w6: R2.2 346.35,1196.83 350.99,1192.19 382.81,1192.19 389.65,1185.35 C3.1 389.65,1117.38 392.34,1114.69 493,1114.69 537.34,1070.34 708.88,1070.34 773.84,1135.31 U3.14
OP2OUT_I: P2.2 R8.2 | length 608.6
  Top Layer w6: P2.2 29,525.16 29,285 70.65,243.35 243.52,243.35 266.61,220.26 R8.2
OP2OUT_Q: P1.1 R9.2 | length 94.2
  Top Layer w6: R9.2 P1.1
OSC_IN: C22.1 U3.12 Y1.1 | length 256.8
  Top Layer w10: C22.1 604.23,1276.21 Y1.1 666.75,1213.7 697.17,1213.7 736.19,1174.68 U3.12
OSC_OUT: C23.1 U3.13 Y1.3 | length 380.2
  Top Layer w10: C23.1 498.42,1158.95 508.29,1149.08 554.15,1149.08 Y1.3 565.98,1155.01 607.81,1113.18 615.79,1113.18 ; 615.8,1113.17 694.34,1113.17 736.18,1155.01 U3.13
PA0_ADC0: C10.1 R8.1 R10.2 U3.23 | length 1689.9
  Top Layer w6: R8.1 R10.2 R10.2@316,154.68 ; C10.1 316.52,154.17 R10.2@316,154.68 ; v2(797.68,775.34) 757,816.02 757,940 775.15,958.15 U3.23 ; v2(810,392) 821.36,380.64 821.36,247.13 786.26,212.03 786.26,46.5 762.76,23 361.01,23 316,68.01 R10.2@316,154.68
  Bottom Layer w6: v2(797.68,775.34) 811.69,761.33 811.69,393.68 v2(810,392)
PA1_ADC1: C11.1 R9.1 R11.2 U3.24 | length 960.8
  Top Layer w6: U3.24 779.46,938.46 772.33,931.33 772.33,849.85 v2(821.36,800.81) ; v2(880,430) 881,430 1043,268 R9.1 C11.1 R11.2
  Bottom Layer w6: v2(821.36,800.81) 821.36,797.93 834,785.3 834,477 880,431 v2(880,430)
PA9_U1_TX: R5.1 U3.68 | length 1013.9
  Top Layer w8: R5.1 1414.87,440.32 1378.54,476.64 1378.54,576.38 1570.9,768.74 1570.9,990.3 v2(1548,1013.2)
  Top Layer w10: U3.68 1412.59,1253.08 1444.47,1253.08 v2(1475.62,1221.94)
  Bottom Layer w8: v2(1475.62,1221.94) 1475.62,1087.68 1544.94,1018.36 1544.94,1016.26 v2(1548,1013.2)
PA10_U1_RX: R6.1 U3.69 | length 902.5
  Top Layer w8: R6.1 1436.35,603.89 1595,762.54 1595,997.83 v2(1579.96,1012.87)
  Top Layer w10: U3.69 1458.2,1273.11 v2(1475.62,1255.69)
  Bottom Layer w8: v2(1475.62,1255.69) 1506.81,1224.5 1506.81,1088.88 1579.96,1015.73 v2(1579.96,1012.87)
PA13_SWDIO: J1.2 U3.72 Z9.K | length 601.4
  Top Layer w8: v2(1468,1508) 1418.15,1557.85 1418.15,1657.14 1475.01,1714 J1.2
  Top Layer w10: U3.72 1458.38,1332.17 1464.21,1338 v2(1468,1338)
  Bottom Layer w8: v2(1468,1338) v2(1468,1508)
PA14_SWCLK: J1.3 U3.76 Z8.K | length 536.4
  Top Layer w8: U3.76 1351.95,1452.97 1351.95,1486.08 1390.59,1524.72 1390.59,1728.39 1477.53,1815.33 1505.5,1815.33 1506.83,1814 J1.3
PC0_adc0: J3.1 U3.81 | length 1223.3
  Top Layer w6: U3.81 1252.8,1498.32 1272.88,1518.4 1272.88,1520.21 1278.39,1525.72 v2(1278.39,1530.59)
  Bottom Layer w6: J3.1 390,1877.3 390,1819.18 693.68,1515.5 1263.29,1515.5 v2(1278.39,1530.59)
PC1_adc1: J3.3 U3.82 | length 1167.7
  Top Layer w6: U3.82 1233.11,1509.42 1257.39,1533.69 1257.39,1563.39 v2(1258,1564)
  Bottom Layer w6: J3.3 469.16,1876.88 469.16,1782.84 707,1545 1205.3,1545 1224.3,1564 v2(1258,1564)
PC2_adc2: J3.4 U3.83 | length 1057.2
  Top Layer w6: U3.83 1213.43,1522.25 1233,1541.82 v2(1233,1543)
  Bottom Layer w6: J3.4 429.3,1801.07 700.37,1530 1218.19,1530 1231.19,1543 v2(1233,1543)
PC3_adc3: J3.5 U3.84 | length 1074.4
  Top Layer w6: U3.84 1193.74,1536.74 1227.2,1570.2 v2@1227.2,1581.65
  Bottom Layer w6: J3.5 511.87,1916.74 546.3,1882.31 546.3,1754.7 695.52,1605.48 1033.81,1605.48 1041.29,1598 1212.63,1598 1225.63,1585 v2(1227,1585)
PC4_adc4: J3.6 U3.85 | length 971.7
  Top Layer w6: U3.85 1174.06,1558.21 v2(1190,1574.15)
  Bottom Layer w6: J3.6 508.04,1767.96 715,1561 1176.85,1561 v2(1190,1574.15)
PC5_adc5: J3.7 U3.86 | length 965.2
  Top Layer w6: v2(1154,1621) 1154.37,1620.63 U3.86 U3.86@1154.37,1450.24
  Bottom Layer w6: J3.7 619.4,1884.12 619.4,1705.6 704,1621 v2(1154,1621)
PC6_adc6: J3.8 U3.87 | length 799.5
  Top Layer w6: J3.8 586.78,1800.71 766.85,1620.63 1085.72,1620.63 1134.69,1571.66 U3.87
PC7_adc7: J3.9 U3.88 | length 857.4
  Top Layer w6: v2(688.03,1668.41) 750.96,1605.48 1081.2,1605.48 1115,1571.68 U3.88
  Bottom Layer w6: J3.9 704,1878.26 704,1814 688.03,1798.03 v2(688.03,1668.41)
PC8_adc8: J3.11 U3.55 | length 1665.3
  Top Layer w6: v2(1298.08,1348.7) 1263.29,1313.92 1263.29,1093.08 1358.85,997.52 U3.55
  Layer 2 w6: J3.11 783.23,1877.77 783.23,1824.43 840.66,1767 1211.19,1767 1253.82,1809.63 1305.71,1809.63 v2(1333.99,1781.35)
  Bottom Layer w6: v2(1298.08,1348.7) 1298.08,1385.86 1390.59,1478.37 1390.59,1724.75 v2(1333.99,1781.35)
PC9_adc9: J3.12 U3.56 | length 1583.9
  Top Layer w6: v2(1320,1372) 1319.08,1371.08 1319.08,1336.33 1283.47,1300.72 1283.47,1094.82 1361.1,1017.2 U3.56
  Layer 2 w6: J3.12 831.26,1751 1222.2,1751 1259.2,1788 1294.22,1788 1329.17,1753.05 1373.54,1753.05 v2(1412.59,1714)
  Bottom Layer w6: v2(1320,1372) 1412.59,1464.59 v2(1412.59,1714)
PC10_adc10: J3.13 U3.57 | length 1651.6
  Top Layer w6: U3.57 1476.2,1036.89 1595,1155.69 v2(1595,1243)
  Layer 2 w6: J3.13 861.12,1878.62 v2(1439.57,1878.62)
  Bottom Layer w6: v2(1439.57,1878.62) 1548,1770.19 1548,1524.07 1576,1496.07 1576,1268 1589.15,1254.85 1589.15,1253.72 1595,1247.87 v2(1595,1243)
PC11_adc11: J3.14 U3.58 | length 1582.2
  Top Layer w6: U3.58 1466.26,1056.57 1573.75,1164.06 v2(1573.75,1220.21)
  Bottom Layer w6: J3.14 861.88,1876.88 1397,1876.88 1528.81,1745.07 1528.81,1507.87 1560,1476.68 1560,1261.16 1573.73,1247.43 v2(1573.75,1220.21)
PD14: J3.23 U3.61 | length 1091.9
  Top Layer w6: v2(1292,1901) 1321.72,1901 1401.01,1821.71 1404.27,1821.71 v2(1406.34,1819.63) ; U3.61 1481.53,1115.63 1551,1185.1 v2(1551,1200.29)
  Bottom Layer w6: J3.23 1226.1,1916.74 1241.84,1901 v2(1292,1901) ; v2(1406.34,1819.63) 1406.34,1817.4 1509.66,1714.07 1509.66,1282.47 1551,1241.13 v2(1551,1200.29)
PD15: J3.24 U3.62 | length 990.4
  Top Layer w6: J3.24 1341.41,1838 v2(1378.7,1800.71) ; U3.62 1475.62,1135.31 1528.81,1188.5 v2(1528.81,1230)
  Bottom Layer w6: v2(1378.7,1800.71) 1495.32,1684.09 1495.32,1265.69 1528.81,1232.2 v2(1528.81,1230)
REFCLK: R31.2 U3.67 U4.28 | length 1667.3
  Top Layer w6: R31.2 488.5,750.38 v1(495.18,743.7) 501.87,737.01 U4.28 ; v2(1351.95,1076.25) 1333.26,1094.94 1333.26,1197 1369.99,1233.74 U3.67
  Layer 2 w6: v1(495.18,743.7) 555.87,683.01 1385.1,683.01 1431.77,729.68 1431.77,996.43 v2(1351.95,1076.25)
RESETB: R46.2 R51.1 U3.32 U4.9 | length 1321.1
  Top Layer w6: v2(308,466) 277.95,435.95 277.95,421.56 R46.2 R51.1 318.73,438.55 350.92,470.74 414.73,470.74 423.21,479.22 U4.9 ; v2(996.89,800.8) U3.32
  Layer 2 w6: v2(308,466) 502.68,466 618.36,581.68 969.31,581.68 v2(997,554)
  Bottom Layer w6: v2@996.89,795.93 v2(996.89,800.8) ; v2(997,554) v2@997,798.37
RX: J2.3 R6.2 Z7.K | length 160.9
  Top Layer w6: R6.2 1480.65,540 J2.3
  Top Layer w8: Z7.K 1479.37,538.72 R6.2
Sawtooth: C21.1 P3.5 R26.1 | length 127.5
  Top Layer w10: P3.5 836,73.92 C21.1 836.35,154.35 R26.1
SI: P3.3 R19.1 | length 81.4
  Top Layer w8: P3.3 637,73.08 R19.1
SPI3_MISO: R17.2 U3.79 | length 780.6
  Top Layer w6: v2(847,1730) 847,1748.37 853.63,1755 R17.2 ; v2(1267,1703) 1325.63,1644.37 1325.63,1521.37 1292.5,1488.24 1292.5,1452.57 U3.79
  Bottom Layer w6: v2(847,1730) 1240,1730 v2(1267,1703)
SPI3_MOSI: R15.2 U3.80 | length 736.7
  Top Layer w6: v2(847,1700) 850.51,1700 859.51,1709 R15.2 ; v2(1267,1673) 1311.6,1628.4 1311.6,1530.59 1272.48,1491.48 U3.80
  Bottom Layer w6: v2(847,1700) 851.04,1700 859.51,1708.47 1231.53,1708.47 v2(1267,1673)
SPI3_NSS: R14.2 U3.77 | length 951.6
  Top Layer w6: v2(714.74,1756) R14.2 ; v2(1266.57,1764.91) 1269.2,1764.91 1353.67,1680.44 1353.67,1507.86 1331.79,1485.98 1331.79,1452.49 U3.77
  Bottom Layer w6: v2(714.74,1756) 718.35,1756 727.25,1764.91 v2(1266.57,1764.91)
SPI3_SCK: R16.2 U3.78 | length 936.8
  Top Layer w6: v2(714.74,1709.38) 750.97,1709.38 R16.2 ; v2(1267,1734) 1339.41,1661.59 1339.41,1513.28 1311.6,1485.47 1311.6,1452.49 U3.78
  Bottom Layer w6: v2(714.74,1709.38) 756.47,1751.11 1249.89,1751.11 v2(1267,1734)
SPI4_MOSI: R19.2 U3.5 | length 1268.6
  Top Layer w6: R19.2 641.03,201.69 702.88,201.69 772.33,271.13 v2(772.33,372) ; 772.33,1312.48 U3.5
  Bottom Layer w6: v2@757.52,1315.53 v2(760.96,1318.98) 760.96,384.51 772.33,373.15 v2(772.33,372)
SPI4_NSS: R18.2 U3.3 | length 1465.2
  Top Layer w6: R18.2 437,217.34 468.66,249 629.82,249 v2(720.04,339.21) ; v2(741.04,1352.29) 741.04,1350.96 746.05,1345.94 751.96,1351.85 U3.3
  Bottom Layer w6: v2(720.04,339.21) 723.51,339.21 746.69,362.38 746.69,383 739.96,389.72 739.96,1351.21 v2(741.04,1352.29)
SPI4_SCK: R20.2 U3.1 | length 1450.4
  Top Layer w6: R20.2 537,217.34 541.98,222.32 646.67,222.32 746.69,322.33 746.69,343.31 v2(720,370) ; v2(720.33,1390.61) 720.94,1391.22 U3.1
  Bottom Layer w6: v2(720,370) 719.56,370.44 719.56,386.56 720.04,387.04 720.04,1390.32 v2(720.33,1390.61)
SPI_CLK: J3.16 R16.1 | length 208.6
  Top Layer w6: R16.1 818.66,1709 823.66,1714 823.66,1764.91 843.23,1784.47 879.45,1784.47 901.74,1806.76 J3.16
SPI_MISO: J3.17 R17.1 | length 182.8
  Top Layer w6: R17.1 929.65,1797.13 942.16,1809.63 942.16,1878.42 J3.17
SPI_MOSI: J3.18 R15.1 | length 162.7
  Top Layer w6: R15.1 951.24,1709 961.85,1719.61 961.85,1815.47 980.48,1834.09 J3.18
SPI_NSS: J3.15 R14.1 | length 224.3
  Top Layer w6: R14.1 794.65,1778.01 813.77,1797.13 845.78,1797.13 862.7,1814.05 862.7,1878.42 901.02,1916.74 J3.15
TX: J2.2 R5.2 Z6.K | length 160.4
  Top Layer w6: R5.2 R5.2@1480,440.17 ; Z6.K R5.2@1480,440.17 ; J2.2 1480.17,440 R5.2@1480,440.17
UD+: P4.3 R40.1 Z4.K | length 466.4
  Top Layer w6: P4.3@212.3,1262.92 P4.3
  Top Layer w9: P4.3 213.8,1271.17 184.87,1271.17 182.94,1273.09 163.36,1273.09 135.87,1245.61 135.87,1228.47 135.97,1228.37 135.97,1218.09 180.78,1173.29 180.78,964.18 186.05,958.91 190.18,958.91 R40.1 197.89,952 Z4.K
UD-: P4.2 R44.1 Z5.K | length 486.8
  Top Layer w6: P4.2@215.63,1294.93 P4.2
  Top Layer w9: Z5.K 148.87,952 R44.1 156.37,959.12 160.5,959.12 165.78,964.39 165.78,1167.08 120.97,1211.88 120.97,1222.15 120.87,1222.25 120.87,1251.82 157.15,1288.09 182.94,1288.09 184.87,1290.01 213.8,1290.01 P4.2
ULPI_DATA0: R34.1 U3.26 | length 251.3
  Top Layer w6: R34.1 778.24,714.43 878.78,814.97 U3.26
ULPI_DATA1: R35.1 U3.35 | length 478.1
  Top Layer w6: R35.1 856.6,670.24 881.11,694.75 989.19,694.75 1055.94,761.49 U3.35
ULPI_DATA2: R37.1 U3.36 | length 518
  Top Layer w6: R37.1 712.06,626.05 838.05,626.05 887,675 992.17,675 1075.63,758.46 U3.36
ULPI_DATA3: R39.1 U3.47 | length 725.8
  Top Layer w6: R39.1 821.24,582.24 895,656 1144,656 1292.17,804.17 U3.47
ULPI_DATA4: R41.1 U3.48 | length 767.9
  Top Layer w6: R41.1 714.43,535.68 801.69,535.68 903,637 1148.13,637 1311.85,800.72 U3.48
ULPI_DATA5: R42.1 U3.51 | length 1001.7
  Top Layer w6: R42.1 789.24,494.24 914,619 1326.7,619 1412.24,704.54 U3.51
ULPI_DATA6: R43.1 U3.52 | length 1110.3
  Top Layer w6: R43.1 773.24,450.24 924,601 1333.92,601 1454.63,721.71 1454.63,931.5 1447.67,938.46 U3.52
ULPI_DATA7: R45.1 U3.91 | length 1313.9
  Top Layer w6: R45.1 756.24,406.24 925,575 1068,575 v2(1070,573) ; v2(1055.95,920.1) U3.91
  Bottom Layer w6: v2(1055.95,920.1) 1055.95,915.23 1070,901.18 v2(1070,573)
ULPI_DIR: R48.2 U3.17 | length 1044.6
  Top Layer w6: v2(406.07,339.3) R48.2 ; v2(648,1048) 669,1027 719,1027 768.26,1076.26 U3.17
  Bottom Layer w6: v2(406.07,339.3) 612,545.23 612,1013 647,1048 v2(648,1048)
ULPI_NXT: R47.2 U3.18 | length 1084
  Top Layer w6: v2(362.07,339.3) R47.2 ; v2(614,1048) 647,1015 731,1015 772.64,1056.64 817.69,1056.64 U3.18
  Bottom Layer w6: v2(362.07,339.3) 591.21,568.44 591.21,1025.21 v2(614,1048)
ULPI_STP: R49.2 U3.15 | length 1029.2
  Top Layer w6: R49.2 450.07,339.3 v2(450.16,339.21) ; v2(682,1048) 714.74,1048 782.36,1115.62 U3.15
  Bottom Layer w6: v2(450.16,339.21) 536.26,425.32 577.68,425.32 666.33,513.96 666.33,1032.33 v2(682,1048)
V_3.3V: C4.1 C5.1 C6.1 C7.1 C8.1 C9.1 C26.1 C27.1 C28.1 C29.1 C37.1 C38.1 C39.1 C40.1 J1.1 J2.1 R1.1 R2.1 R7.1 R36.1 R46.1 R54.1 R55.1 R56.1 U3.6 U3.11 U3.19 U3.21 U3.22 U3.28 U3.50 U3.75 U3.100 U4.6 U4.16 U4.25 U4.30 U4.31 | length 9270.9
  Top Layer w10: R36.1@239.41,650 R36.1 246.29,643.12 247.35,643.12 272.39,618.08 272.39,610.61 v1(275,608) ; v1@283.07,606.35 C40.1 307.35,606 335.87,606 372.34,569.54 U4.6 ; C4.1 337.51,826 349.59,813.92 349.59,757.68 378.47,728.81 442.82,728.81 ; U4.31 442.82,728.81 ; U4.30 461.98,697.94 461.98,717.26 450.44,728.81 442.82,728.81 ; U4.25 560.99,697.49 560.99,719.84 579.15,738 648.57,738 C39.1 ; U4.16 561.01,481.62 583.19,459.44 583.19,418.84 C37.1
  Top Layer w12: R2.1 434.91,1213 v2(435,1212.91) ; C28.1@659.65,908.29 691.42,908.29 760.96,977.83 ; C26.1@659.65,989 735.21,989 783.1,1036.89 U3.19 ; C5.1@672.83,1385.17 672.83,1436.83 v2(673,1437) ; U3.22 760.96,977.83 ; U3.21 780.65,997.52 760.96,977.83 ; U3.11 783.23,1194.37 672.65,1304.95 C5.1 677.95,1379.7 692.4,1379.7 710.4,1361.7 710.4,1313.95 731.55,1292.8 U3.6 ; C7.1@862.7,1577.01 862.7,1543.12 878.78,1527.04 U3.100 ; U3.28 918.06,857.67 918.06,821.27 898.48,801.7 898.48,749.17 C38.1 v2(930,746)
  Top Layer w15: v2(275.16,344.31) 275.21,344.37 275.21,375.51 R46.1 ; C4.1 307,860.78 v2(307.65,861.43) ; C37.1 585.16,416.49 602.6,416.49 v2(626.99,392.09) ; v2(823.66,1582) C7.1 ; R56.1 R55.1 R54.1 1504.47,104.72 1598,198.25 J2.1 ; U3.50 C8.1 v2(1386.65,747.84) ; U3.75 1466.4,1391.22 1487.18,1412 C9.1 v2@1529.35,1444.91
  Top Layer w20: v2(643.13,793.81) 643.89,793.05 660.44,793.05 669.06,784.42 C39.1 ; C27.1@653.13,840.35 659.65,846.87 C28.1 659.65,908.29 C29.1 ; C26.1 659.65,989 C29.1 ; v2(696.45,951.81) 695.37,951.81 691.56,948 C29.1
  Top Layer w25: v2(977.21,1652.84) R7.1
  Layer 2 w20: v1(54,1797) v1(84,1797) 84.69,1797.69 100.88,1797.69 141.19,1838 274.42,1838 321.66,1790.76 461.24,1790.76 623.91,1628.09 623.91,1436.33 ; v1@275.16,606 v2(275.16,344.31) 309,310.47 583.8,310.47 626.99,353.67 v2(626.99,392.09) ; v1@276.08,606.92 307,637.84 307,757.34 306.65,757.68 306.65,793.81 ; 627.18,1582 v2(823.66,1582) 858.18,1582 929.02,1652.84 v2(977.21,1652.84) ; v2(643.13,793.81) 306.65,793.81 ; v2(1386.65,747.84) 1385.57,747.84 1383.72,746 v2(930,746) 924.24,746 718.43,951.81 v2(696.45,951.81) 643.78,951.81 525.25,1070.34 435,1070.34 ; J1.1 1598,1516 v2(1535,1453) 1533.92,1453 1516.92,1436.01 673,1436.01 575.47,1436.01 435,1295.53 v2(435,1212.91) 435,1070.34 ; 306.65,793.81 306.65,857.6 306.89,857.84 306.89,860.67 v2(307.65,861.43) 307.33,861.76 307.33,1019.57 358.1,1070.34 435,1070.34
  Bottom Layer w20: v2(1386.65,747.84) 1434.51,747.84 1522.04,660.32 1522.04,365.96 1548,340 J2.1
VCC_USB: P4.1 R29.2 Z3.K | length 131.8
  Top Layer w18: P4.1 R29.2 Z3.K
VDD18: C35.1 C36.1 U4.15 U4.26 | length 585.4
  Top Layer w10: C36.1 538.82,419.31 538.82,439.82 v1(552,453) 552,454.98 541.32,465.67 U4.15 ; U4.26 541.24,724.58 585.75,769.1 622.11,769.1 629.21,762 v2(633,762)
  Bottom Layer w10: v1(552,453) 554.61,455.61 565.9,455.61 638,527.71 638,749.14 635.68,751.46 635.68,759.32 v2(633,762)
VDDA18: C33.1 C34.1 U4.29 | length 159.8
  Top Layer w10: C34.1 423.19,755.66 434.04,744.81 457.06,744.81 482.08,719.79 482.08,697.54 U4.29
  Top Layer w20: C33.1 C34.1
VIN: C12.1 C13.1 C19.1 C20.2 C32.1 P1.3 P2.4 R23.1 R24.2 R29.1 R38.2 T2.1 U1.5 | length 3632.8
  Top Layer w20: P2.4 P2.4@87.35,383.5 ; v2(229.72,738) C32.1 R38.2 ; R29.1 351,1317.57 v2(351,1276) ; v2(1078.08,128) 1117.5,128 C12.1 1172.36,122.5 P1.3
  Top Layer w25: P2.4 86.85,291.73 C13.1@87.35,291.23 ; R24.2 R24.2@416,1418.65 ; C20.2 503.19,1510.07 v2(665.52,1510.07) ; R23.1 v2(1227.2,1652.93)
  Layer 2 w20: v2(229.72,738) 34.7,738 29,743.7 ; v2(351,1276) 330.22,1276 276.16,1221.93 276.16,1164.33 29,917.17 29,743.7 ; v2(1078.08,128) 258.28,128 86.85,299.43 P2.4 29,440.86 29,743.7
  Layer 2 w25: v2(665.52,1510.07) 982.93,1510.07 1125.79,1652.93 v2(1227.2,1652.93)
XIN: C30.1 R30.2 R31.1 Y2.1 | length 261.9
  Top Layer w10: C30.1 317.11,917.23 Y2.1 377.86,881.04 394.46,864.44 R30.2 488.84,819.44 R31.1
XOUT: C31.1 R30.1 R32.1 Y2.3 | length 294.3
  Top Layer w10: C31.1 451.76,1010.2 451.76,1002.78 470.38,984.16 Y2.3 515.41,984.16 532.15,967.42 R30.1 532.15,820.03 R32.1
pads on no net: P4.4 U3.2 U3.4 U3.7 U3.8 U3.9 U3.16 U3.25 U3.31 U3.33 U3.34 U3.38 U3.39 U3.41 U3.42 U3.46 U3.53 U3.54 U3.59 U3.60 U3.63 U3.64 U3.65 U3.66 U3.89 U3.90 U3.92 U3.93 U3.95 U3.96 U3.97 U3.98 U4.3 U4.5 U4.10
copper on no net:
  other v1: 767,230 786,648

## Polygon pours and split planes (outlines as drawn)
GND on Bottom Layer "Bottom Layer-GND" (solid, remove dead copper, pour order 20): 1,1966 1,0 1654,0 1654,1966 1,1966
no net on Bottom Layer "Bottom Layer-No Net" (solid, pour order 10): 159.46,1873.54
GND on Top Layer "Top Layer-GND" (solid, remove dead copper, pour order 18): 1,1966 1,0 1654,0 1654,1966
no net on Top Layer "Top Layer-No Net 1" (solid, remove dead copper, pour order 16): 1030.77,873.5
no net on Top Layer "Top Layer-No Net" (solid, pour order 14): 199.46,499.81
GND on Layer 1 "Layer 1-GND" (solid, remove dead copper, pour order 22): 1,0 1654,0 1654,1966 1,1966
GND on Layer 2 "Layer 2-GND" (solid, remove dead copper, pour order 24): 1,1966 1,0 1654,0 1654,1966 1,1966

## Other copper
Top Layer:
  region net V_3.3V: 49,1815.13 38,1804.13 38,1740.06 49,1729.06
  region net V_3.3V: 49,1729.06 49,1788 49,1815.13 90.03,1815.13 101.03,1804.13 101.03,1736.56 93.16,1729.06
  region net NetC1_2: 255.66,1609.81 247,1601.15 247,1539 252,1534 294,1534 294,1534.32 300,1540.32 300,1575 311.19,1586.19 336.16,1586.19 336.16,1609.81
  region net NetC2_1: 65,1708 70,1713 220.22,1713 234.56,1727.34 234.56,1744.56 245.05,1755.05 283.63,1755.05 283.63,1754.21 293.84,1744 293.84,1643.34 279.56,1629.06 244.73,1629.06 244.73,1629.27 211.83,1662.17 80.83,1662.17 65,1678
  region net NetC1_1: 350.83,1536.28 351,1744 358.11,1751.11 393.9,1751.11 401,1744 401,1543.12 394.16,1536.28
  region net VIN: 404,1362 380.66,1338.66 337.66,1338.66 333,1334 333,1303.78 337.48,1299.29 410.82,1299.29 454.13,1342.6
  region net VIN: 402.84,1431.81 421.16,1450.13 421.16,1483.6 406.44,1498.32 350.78,1498.32 350.78,1524.02 392.24,1524.02 397.09,1528.87 515.88,1528.87 521.63,1523.13 521.63,1410.1 454.13,1342.6 402.84,1342.6

## Silkscreen, mask and mechanical layers (free items; w line width, h text height)
Top Overlay: